# Altium PCB GlassBoard.PcbDoc (part 1 of 2)
Units mil, origin at the board's own origin, x right, y up, seen from the top; angles counter-clockwise.
Board outline 2030 x 2020 mil, 4 copper layers (Top Layer, Plane (GND), Plane (PWR), Bottom Layer), stack 23.756 mil thick; 84 components, 48 nets, 261 pads, 94 vias.
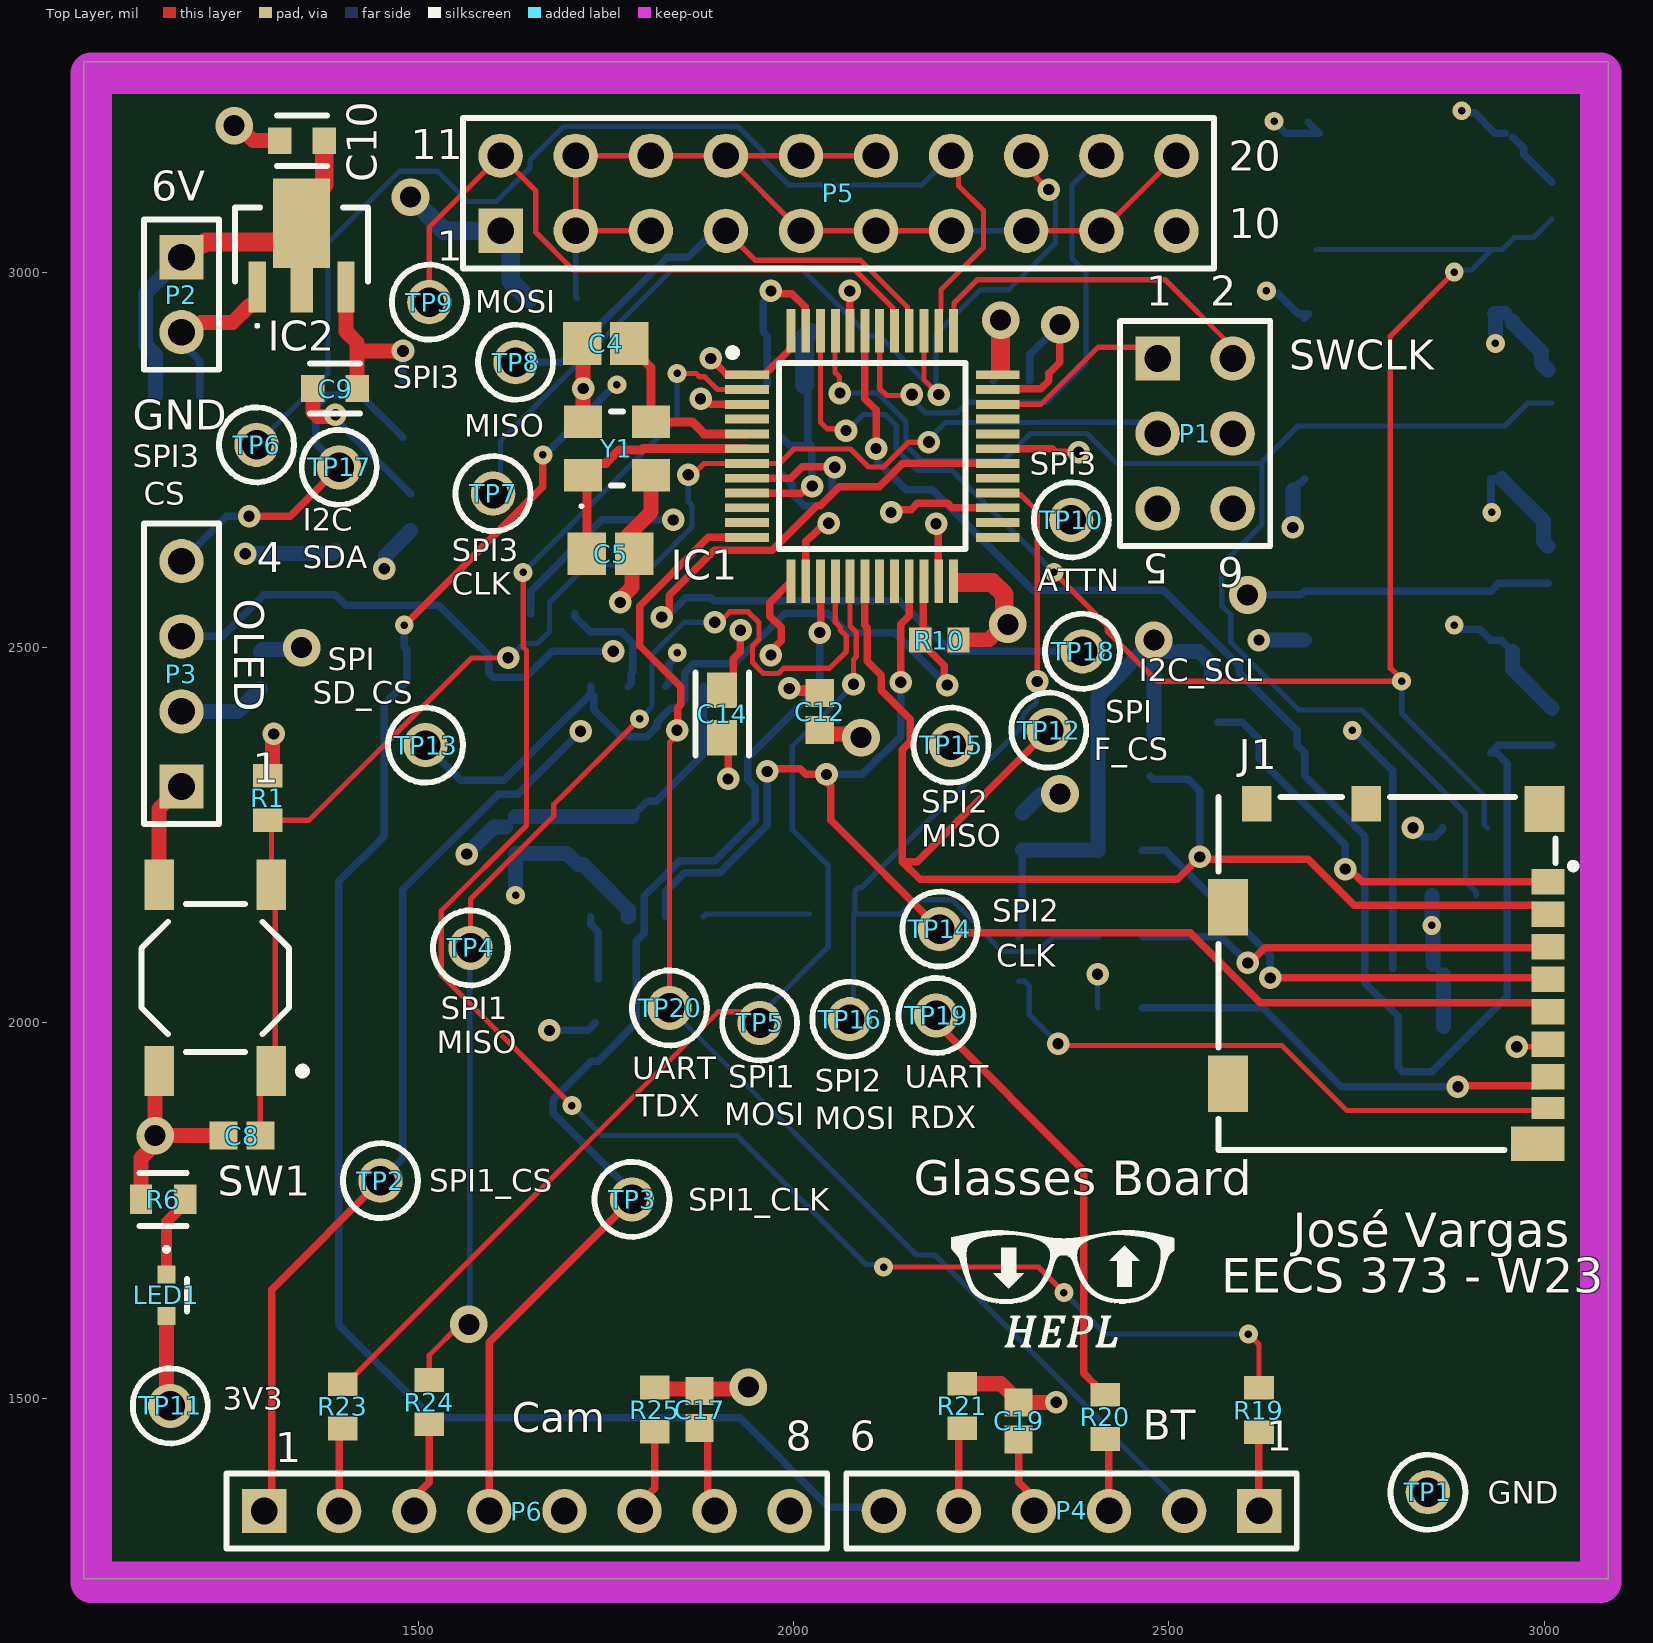
[diagram p0: Top Layer view]
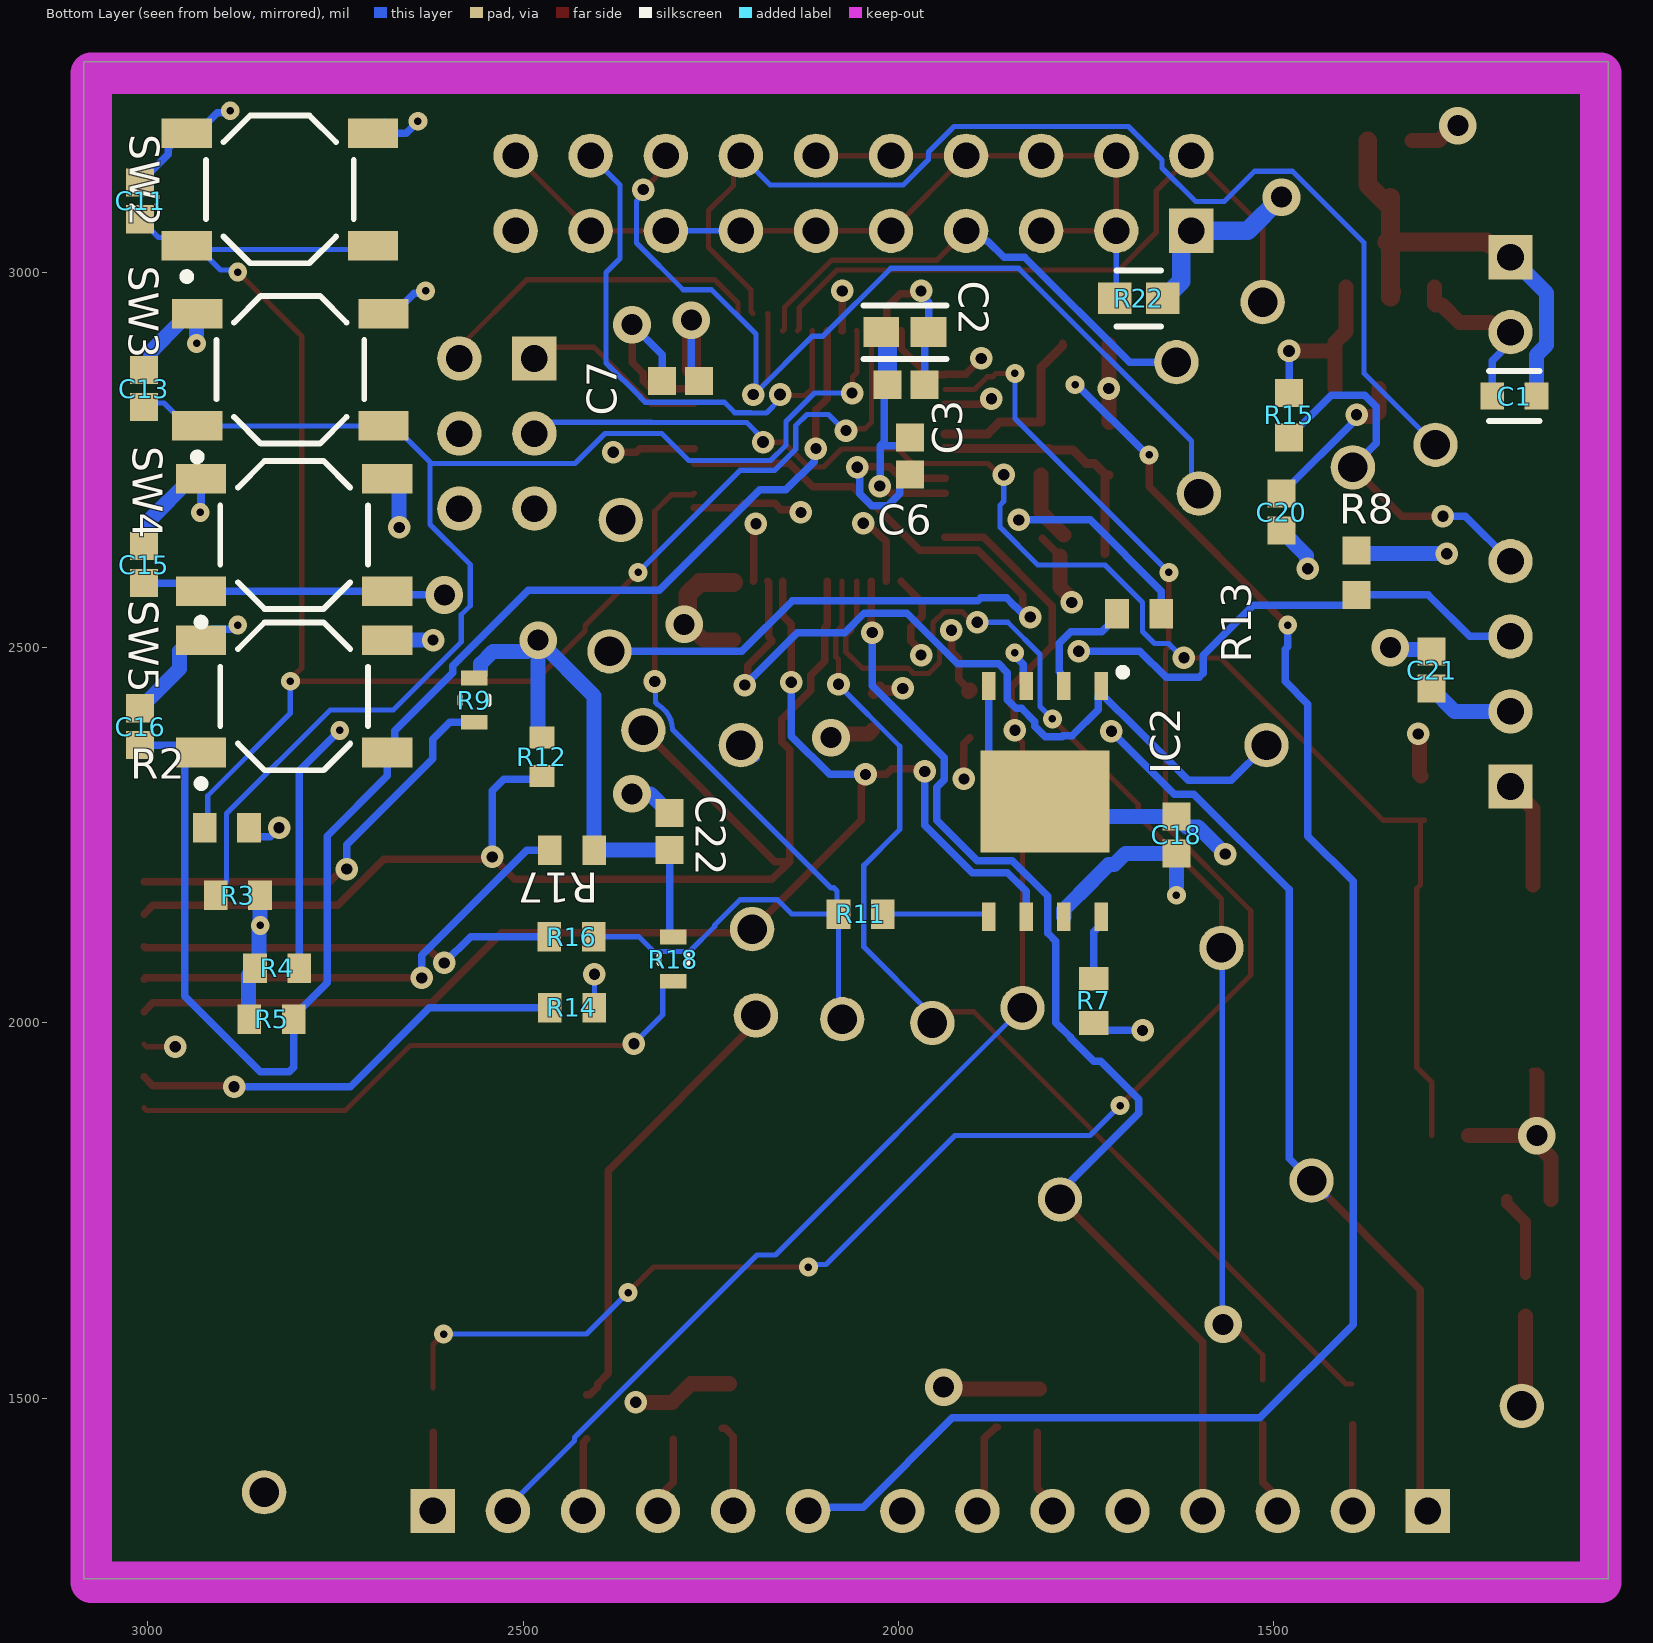
[diagram p1: Bottom Layer view, seen from below]
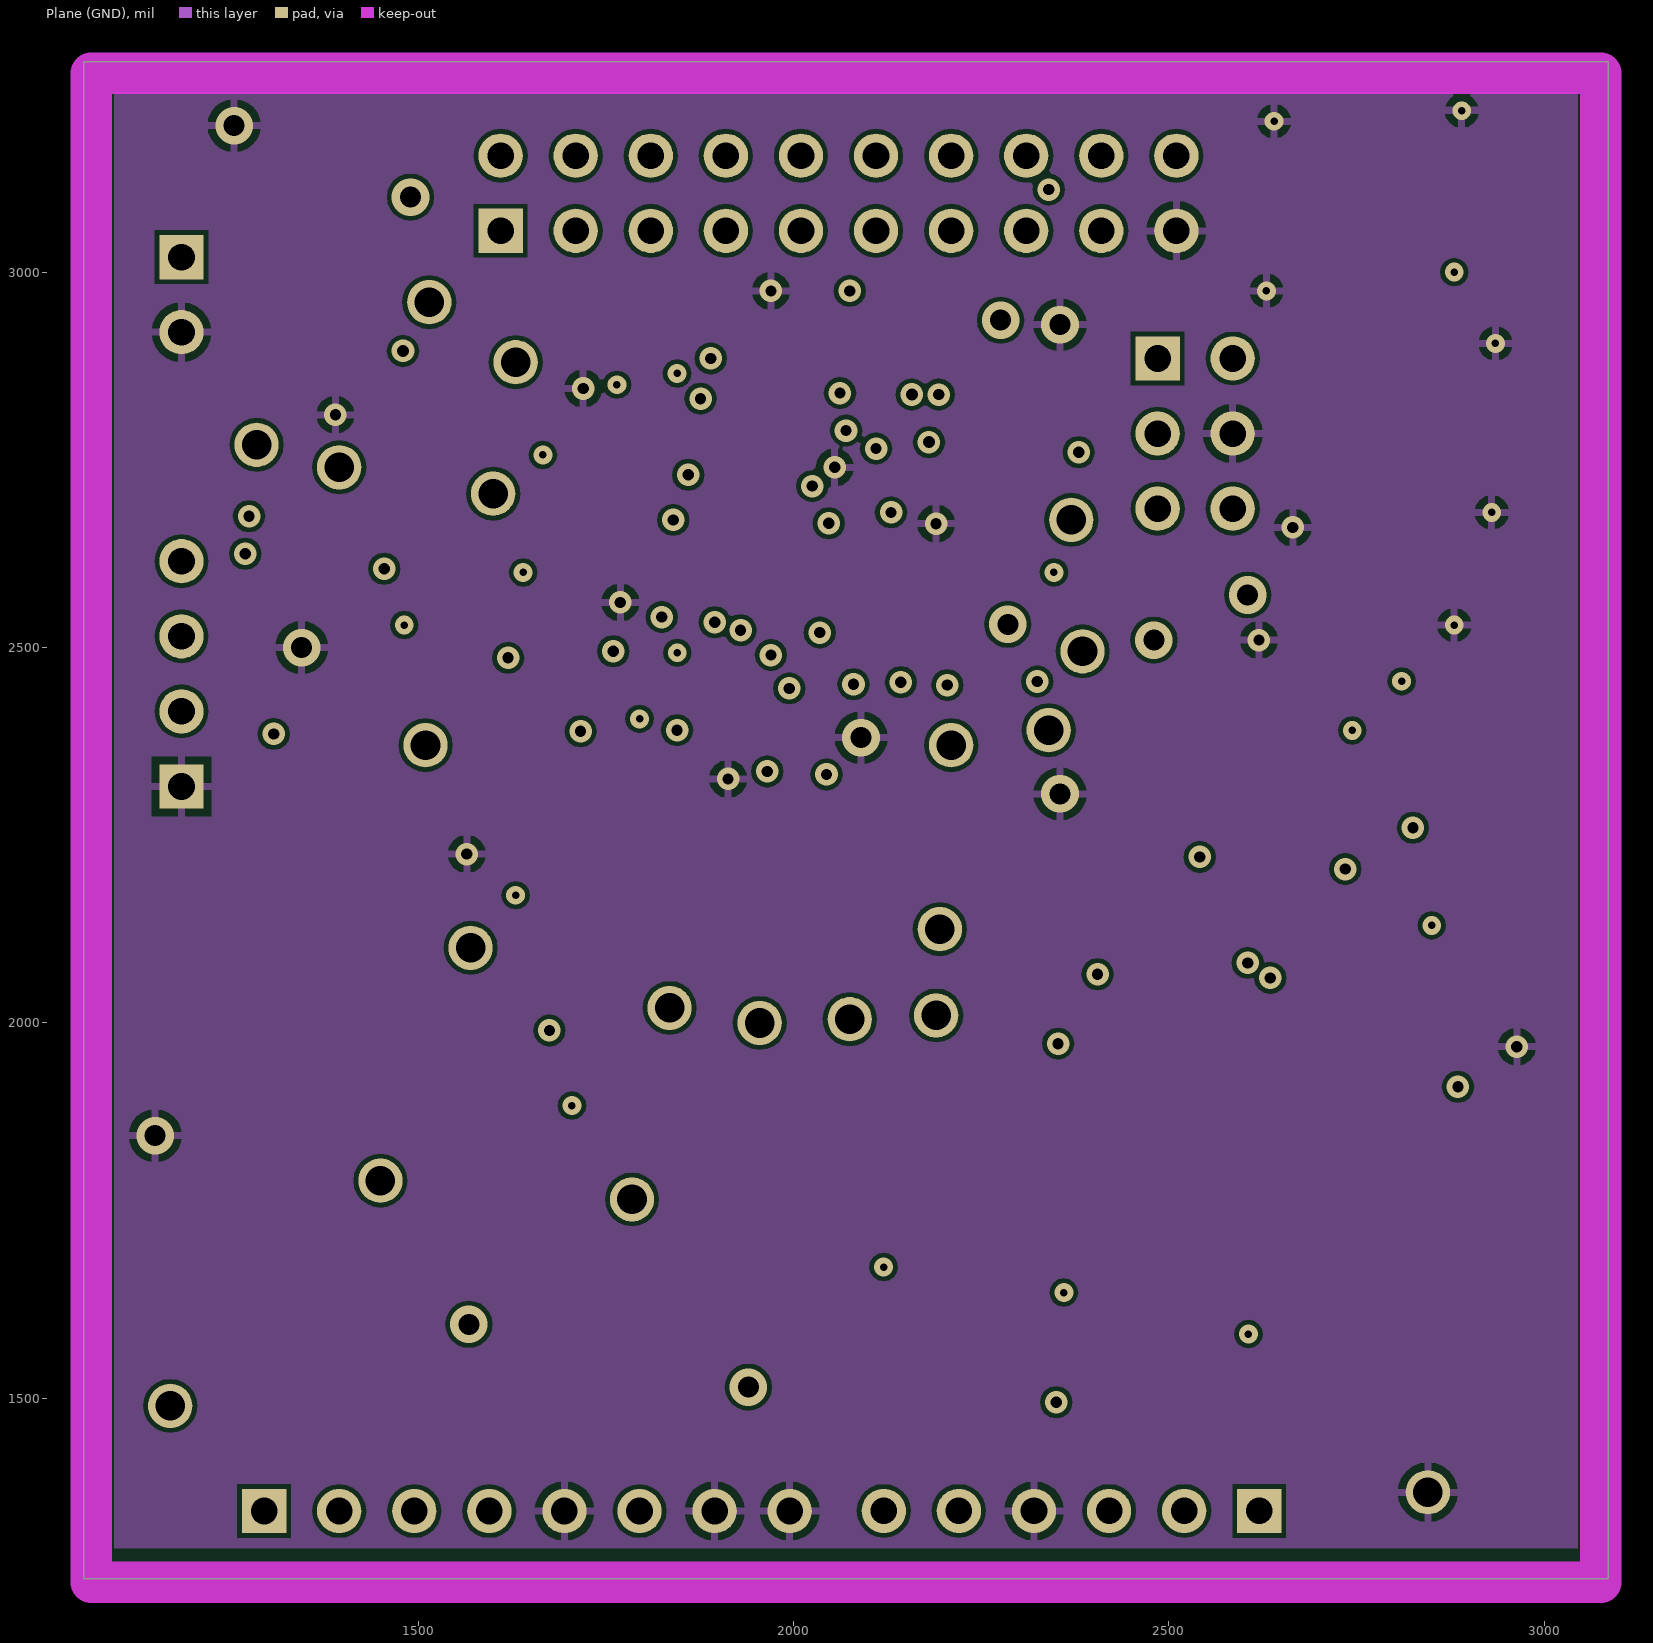
[diagram p2: Plane (GND)]
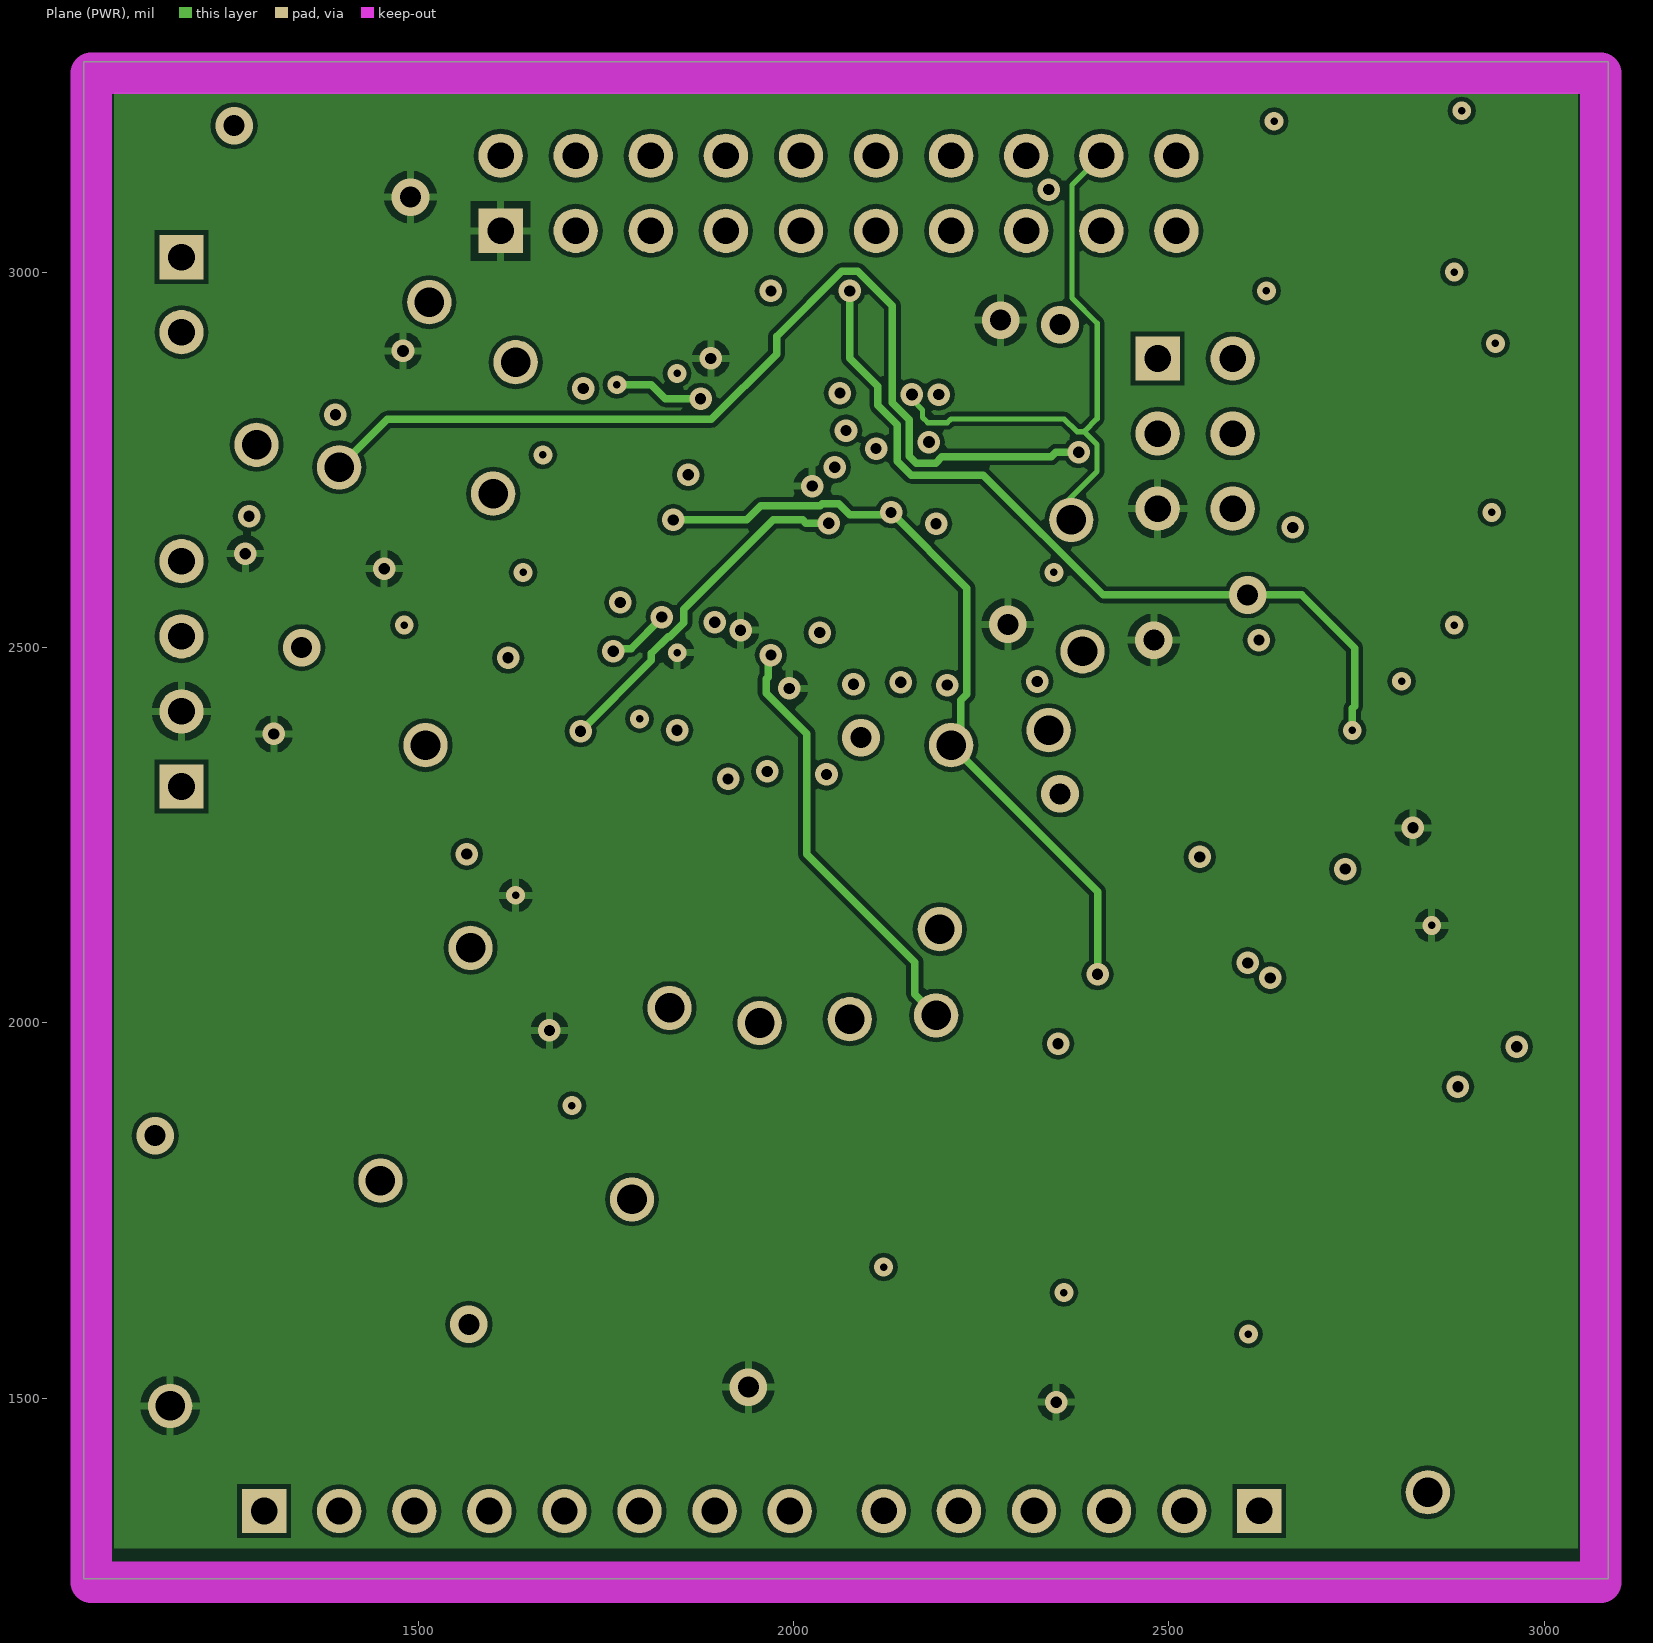
[diagram p3: Plane (PWR)]
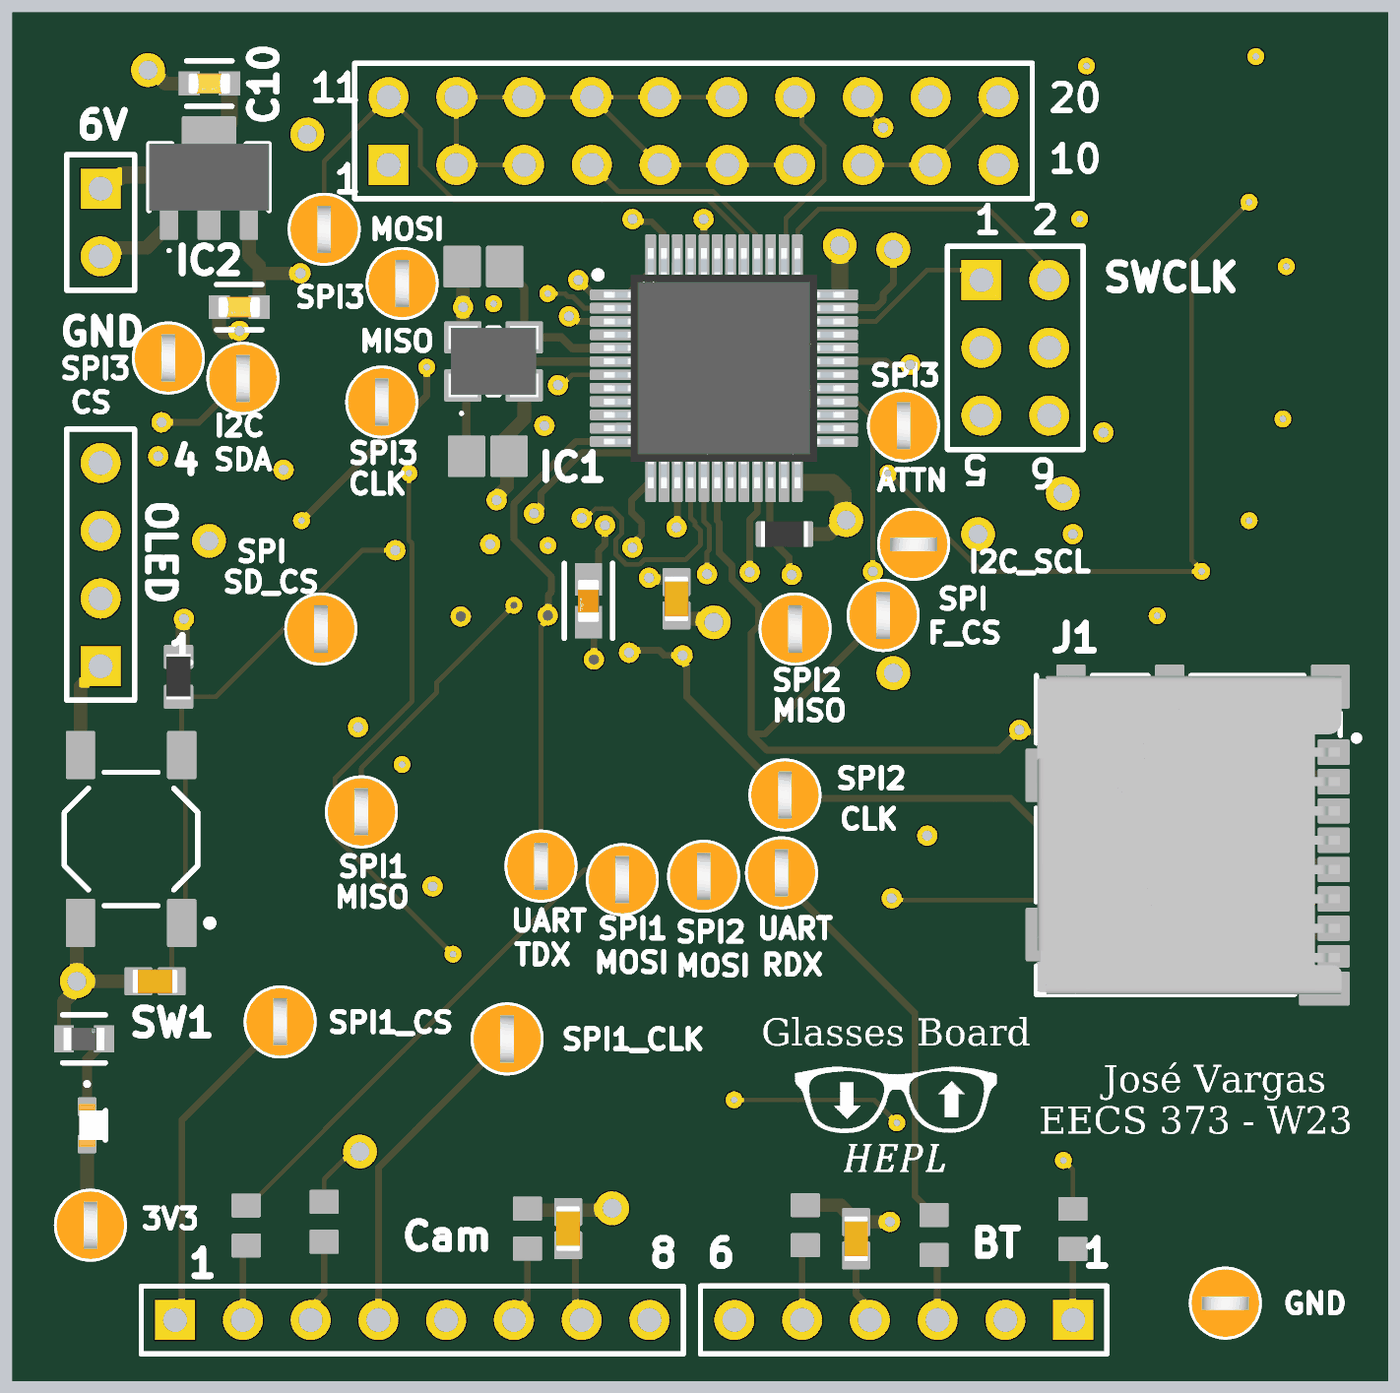
[diagram p4: 3D render of the assembled board from above, using the file's embedded part models]
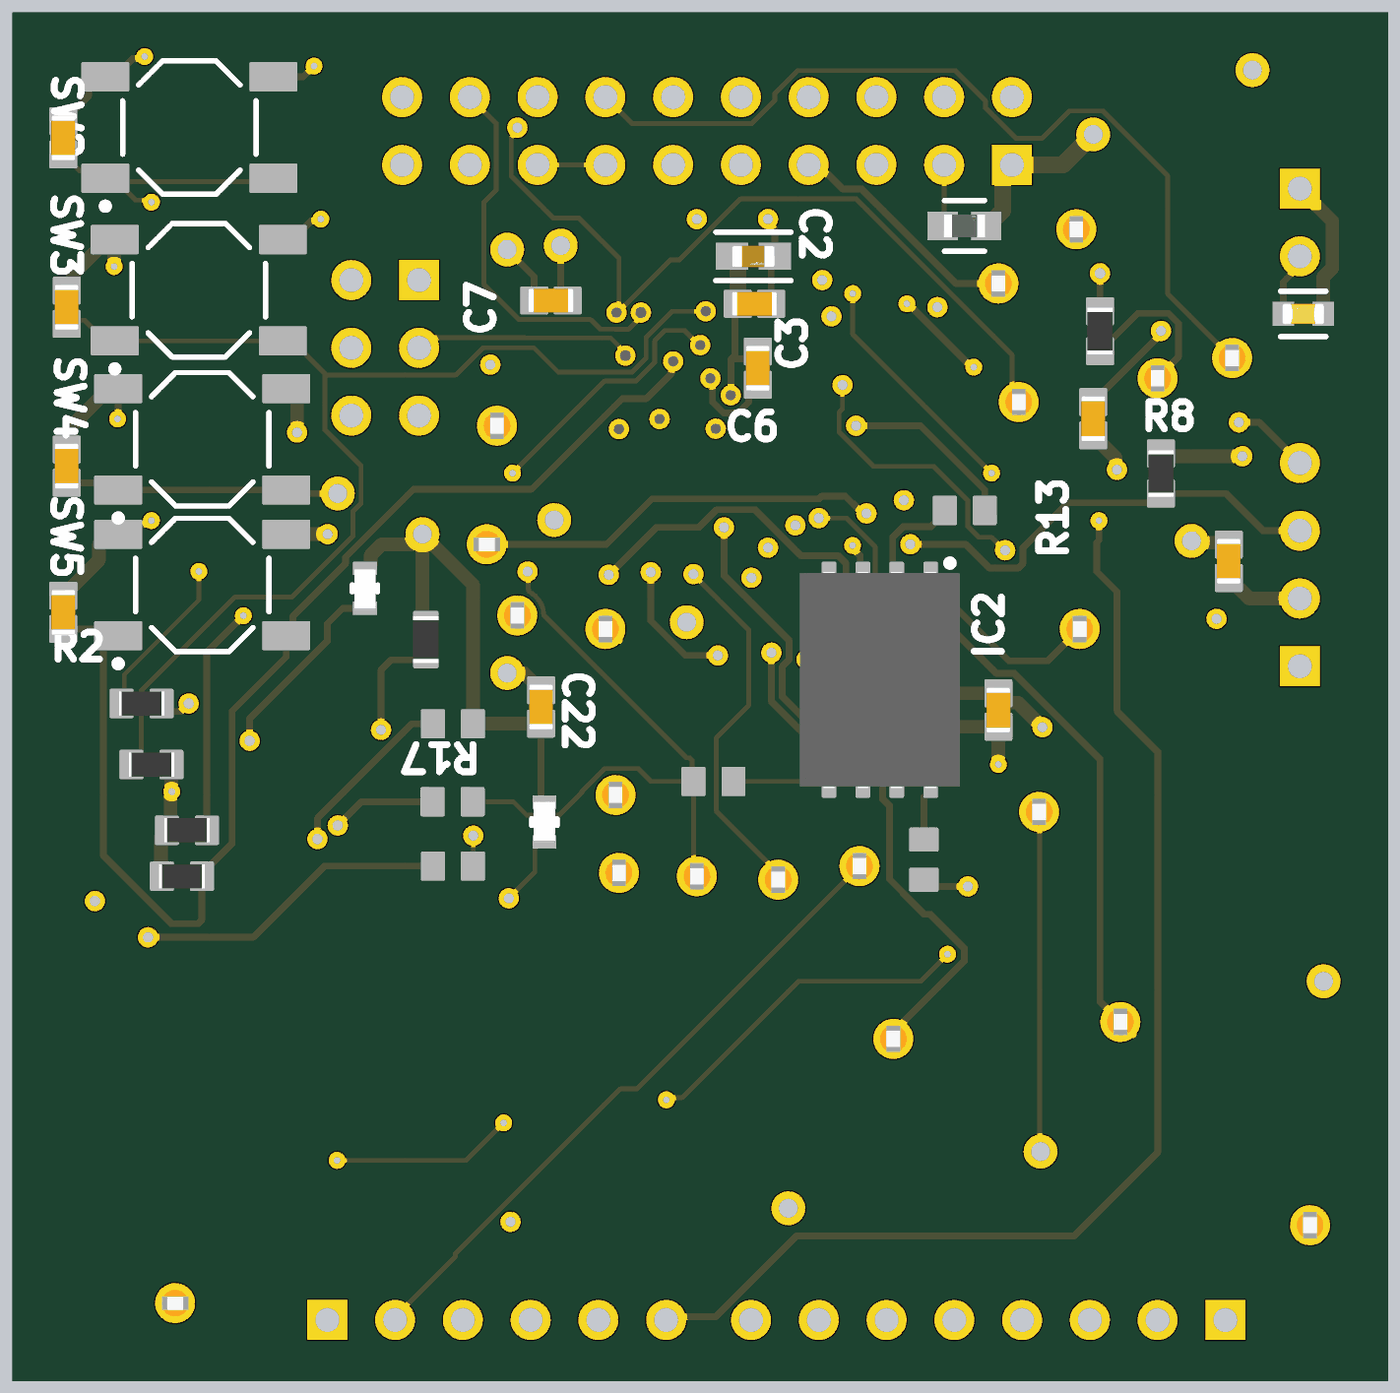
[diagram p5: 3D render of the assembled board from below, using the file's embedded part models]

## Layer stack, top to bottom
Top Solder: solder mask 0.4, Solder Resist, Dk 3.5
Top Layer: signal copper 1.4
Dielectric 2: prepreg 2.8, PP-006, Dk 4.1
Plane (GND): signal copper 1.378
Dielectric 1: dielectric 12.6, FR-4, Dk 4.8
Plane (PWR): signal copper 1.378
Dielectric 3: prepreg 2.8, PP-006, Dk 4.1
Bottom Layer: signal copper 1.4
Bottom Solder: solder mask 0.4, Solder Resist, Dk 3.5

## Board outline
1055,1260 1055,3280 3085,3280 3085,1260

## Design rules (kind name [scope] priority, off if disabled: settings)
BoardOutlineClearance [All] p1: gap=40 ignorepadtopadclearanceinfootprint=FALSE
Clearance [All] p1: gap=6 ignorepadtopadclearanceinfootprint=TRUE
HoleSize [All] p1: absolutevalues=TRUE maxlimit=50 minlimit=3.94 maxpercent=80.000 minpercent=20.000
HoleToHoleClearance [All] p1: gap=19.68 allowstackedmicrovias=TRUE
MinimumAnnularRing [All] p1: minimumring=6
MinimumSolderMaskSliver MinimumSolderMaskSliver_1 [All] p1: minsoldermaskwidth=7.87
PasteMaskExpansion [All] p1: expansion=2
PolygonConnect [All] p1: connectstyle=Relief reliefconductorwidth=10 reliefentries=4 polygonreliefangle="90 Angle" airgapwidth=10
RoutingVias [All] p1: holewidth=10 width=25 viastyle="Through Hole" minholewidth=10 minwidth=25 maxholewidth=10 maxwidth=25
SilkToSilkClearance [All] p1: silktosilkclearance=7.87
SilkToSolderMaskClearance [IsPad] p1: minsilkscreentomaskgap=7.87 clearancetoexposedcopper=TRUE
SolderMaskExpansion [All] p1: expansion=1.97 istentingtop=FALSE
Width [All] p1: maxlimit=30 minlimit=6 preferedwidth=7 minimp=50.000000 maximp=50.000000 favimp=50.000000
24 further rules are at their usual default settings.

## Classes and differential pairs
component class Peripherals: C17 C18 C19 C20 C21 C22 IC2 J1 P3 P4 P5 P6 R7 R8 R9 R10 R11 R12 R13 R14 R15 R16 R17 R18 R19 R20 R21 R22 R23 R24 R25 XBEE
component class GlassBoard: C1 C2 C3 C4 C5 C6 C7 C8 C9 C10 C11 C12 C13 C14 C15 C16 IC1 IC2 LED1 P1 P2 R1 R2 R3 R4 R5 R6 "r     r" SW1 SW2 SW3 SW4 SW5 TP1 TP2 TP3 TP4 TP5 TP6 TP7 TP8 TP9 TP10 TP11 TP12 TP13 TP14 TP15 TP16 TP17 TP18 TP19 TP20 Y1

## Components (designator, comment, footprint, x,y, rotation, side; value= is the part's Value field where it differs from the comment)
C1 "1uF" FP-CC0603-DA-MFG 1180,2835 r0 bottom value="1 uF"
C2 "10uF" FP-GRM188-0_1-e0_2_0_55-IPC_A 1991.57,2920 r180 bottom
C3 "Capacitor 100 nF +/-10% 50 V 0603" CAPC1608X90X40NL10T20 1990,2850 r0 bottom value=100nF
C4 "20pF" CAPC2013X140X50NL20T25 1750,2905 r180 top
C5 "20pF" CAPC2013X140X50NL20T25 1756.5,2625 r180 top
C6 "Capacitor 100 nF +/-10% 50 V 0603" CAPC1608X90X40NL10T20 1985,2755 r90 bottom value=100nF
C7 "Capacitor 100 nF +/-10% 50 V 0603" CAPC1608X90X40NL10T20 2290.39,2855 r180 bottom value=100nF
C8 "Capacitor 100 nF +/-10% 50 V 0603" CAPC1608X90X40NL10T20 1265.39,1850 r0 top value=100nF
C9 "1uF" FP-CC0603-DA-MFG 1389.53,2845 r0 top value="1 uF"
C10 "1uF" FP-CC0603-DA-MFG 1345.47,3175 r0 top value="1 uF"
C11 "Capacitor 100 nF +/-10% 50 V 0603" CAPC1608X90X40NL10T20 3010,3095 r90 bottom value=100nF
C12 "Capacitor 100 nF +/-10% 50 V 0603" CAPC1608X90X40NL10T20 2035,2414.61 r90 top value=100nF
C13 "Capacitor 100 nF +/-10% 50 V 0603" CAPC1608X90X40NL10T20 3005,2845 r90 bottom value=100nF
C14 "10uF" FP-GRM188-0_1-e0_2_0_55-IPC_A 1905,2411.57 r270 top
C15 "Capacitor 100 nF +/-10% 50 V 0603" CAPC1608X90X40NL10T20 3005,2610.39 r90 bottom value=100nF
C16 "Capacitor 100 nF +/-10% 50 V 0603" CAPC1608X90X40NL10T20 3010,2394.61 r90 bottom value=100nF
C17 "Capacitor 100 nF +/-10% 50 V 0603" CAPC1608X90X40NL10T20 1875,1485 r90 top value=100nF
C18 "Capacitor 100 nF +/-10% 50 V 0603" CAPC1608X90X40NL10T20 1630,2250.39 r270 bottom value=100nF
C19 "Capacitor 100 nF +/-10% 50 V 0603" CAPC1608X90X40NL10T20 2300,1470 r90 top value=100nF
C20 "Capacitor 100 nF +/-10% 50 V 0603" CAPC1608X90X40NL10T20 1490,2680.39 r270 bottom value=100nF
C21 "Capacitor 100 nF +/-10% 50 V 0603" CAPC1608X90X40NL10T20 1290,2470 r270 bottom value=100nF
C22 "Capacitor 100 nF +/-10% 50 V 0603" CAPC1608X90X40NL10T20 2305,2255 r270 bottom value=100nF
IC1 "STM32L443CCT6" QFP50P900X900X160-48N 2105,2755 r0 top
IC2 "AP7365-33YRG-13" AP736533YRG13 1345,3036.85 r0 top
IC2 "W25N01GVZEIG_TR" SON127P800X600X80-9N-D 1805,2295 r270 bottom
J1 "104031-0811" 1040310811 3014.76,2065.91 r90 top
LED1 "Blue - 0603" 155060BS75300 1165,1637.44 r270 top
P1 "Debug Header" HDR2X3 2485,2885 r270 top
P2 "6V Battery" HDR1X2 1185,3020 r270 top
P3 "OLED Display" HDR1X4 1185,2315 r90 top
P4 "Bluetooth Chip" HDR1X6 2620.36,1350.12 r180 top
P5 "XBEE" HDR2X10_CEN 1610,3055 r0 top
P6 "Arducam" HDR1X8 1295,1350 r0 top
R1 "Resistor 10k +/-1% 0603 100 mW" RESC1608X55X25ML10T15 1300,2299.53 r90 top value="10k - 0603"
R2 "Resistor 10k +/-1% 0603 100 mW" RESC1608X55X25ML10T15 2894.53,2260 r180 bottom value=10k
R3 "Resistor 10k +/-1% 0603 100 mW" RESC1608X55X25ML10T15 2880,2170 r180 bottom value=10k
R4 "Resistor 10k +/-1% 0603 100 mW" RESC1608X55X25ML10T15 2827.6,2072.87 r0 bottom value=10k
R5 "Resistor 10k +/-1% 0603 100 mW" RESC1608X55X25ML10T15 2835,2005 r0 bottom value=10k
R6 "220 - 0603" FP-CRCW0603-e3-MFG 1160.47,1765 r0 top
R7 "0 - 0603" RESC1608X55X25ML10T15 1740,2029.53 r90 bottom
R8 "4.7k - 0603" RESC1608X55X30NL15T15 1390,2599.53 r90 bottom
R9 "50k - 0603" FP-TNPU0603-e3-MFG 2565,2430 r90 bottom
R10 "10k - 0603" RESC1609X55X30LL15T15 2194.41,2510 r0 top
R11 "0 - 0603" RESC1608X55X25ML10T15 2050.47,2145 r180 bottom
R12 "10k - 0603" RESC1609X55X30LL15T15 2475,2354.41 r90 bottom
R13 "0 - 0603" RESC1608X55X25ML10T15 1679.53,2545 r180 bottom
R14 "0 - 0603" RESC1608X55X25ML10T15 2435,2020 r180 bottom
R15 "4.7k - 0603" RESC1608X55X30NL15T15 1480,2809.53 r270 bottom
R16 "0 - 0603" RESC1608X55X25ML10T15 2435.47,2115 r180 bottom
R17 "0 - 0603" RESC1608X55X25ML10T15 2435,2230 r180 bottom
R18 "50k - 0603" FP-TNPU0603-e3-MFG 2300,2085 r270 bottom
R19 "0 - 0603" RESC1608X55X25ML10T15 2620,1484.53 r270 top
R20 "0 - 0603" RESC1608X55X25ML10T15 2415,1475.47 r270 top
R21 "0 - 0603" RESC1608X55X25ML10T15 2225,1490 r270 top
R22 "27k - 0603" FP-CRCW0603-e3-IPC_A 1680,2965 r180 bottom
R23 "0 - 0603" RESC1608X55X25ML10T15 1400,1489.53 r270 top
R24 "0 - 0603" RESC1608X55X25ML10T15 1515,1495 r90 top
R25 "0 - 0603" RESC1608X55X25ML10T15 1815,1485 r270 top
SW1 "TL3342F160QG" ESWI-TL3342F160QG_V 1230,2060 r180 top
SW2 "TL3342F160QG" ESWI-TL3342F160QG_V 2824.02,3110.2 r90 bottom
SW3 "TL3342F160QG" ESWI-TL3342F160QG_V 2810,2870 r90 bottom
SW4 "TL3342F160QG" ESWI-TL3342F160QG_V 2805,2650 r90 bottom
SW5 "TL3342F160QG" ESWI-TL3342F160QG_V 2805,2435 r90 bottom
TP1 "5003" KSTN-5003 2845,1375 r0 top
TP2 "5003" KSTN-5003 1450,1790 r90 top
TP3 "5003" KSTN-5003 1785,1765 r90 top
TP4 "5003" KSTN-5003 1569.96,2100.04 r90 top
TP5 "5003" KSTN-5003 1955,2000 r90 top
TP6 "5003" KSTN-5003 1285,2770 r270 top
TP7 "5003" KSTN-5003 1600,2705 r270 top
TP8 "5003" KSTN-5003 1630,2880 r270 top
TP9 "5003" KSTN-5003 1515,2960 r270 top
TP10 "5003" KSTN-5003 2370,2670 r270 top
TP11 "5003" KSTN-5003 1170,1490 r90 top
TP12 "5003" KSTN-5003 2340,2390 r90 top
TP13 "5003" KSTN-5003 1510,2370 r90 top
TP14 "5003" KSTN-5003 2195,2125 r90 top
TP15 "5003" KSTN-5003 2210,2370 r90 top
TP16 "5003" KSTN-5003 2075,2005 r90 top
TP17 "5003" KSTN-5003 1395,2740 r90 top
TP18 "5003" KSTN-5003 2385,2495 r180 top
TP19 "5003" KSTN-5003 2190,2010 r90 top
TP20 "5003" KSTN-5003 1835,2020 r90 top
Y1 "ECS-160-12-33-AGN-TR3" ECS1601233AGNTR3 1765,2765 r0 top

## Footprints (in the part's own frame and the unit in brackets; to place one, negate y for a bottom-side part, rotate by r counter-clockwise, add the part's x,y. Pads: shape width x height; smd on the part's side, far side on the other; paste and mask are expansions set on the pad)
155060BS75300 [mm]
  rect 0.6x0.6 smd: 1(-0.7,0) 2(0.7,0)
  silkscreen extent -1.6,-0.05 0.55,0.69, body extent -0.8,-0.31 0.8,0.69, height 1
1040310811 [mm]
  rect 0.85x1.1 smd: 1(3.105,0.25) 2(2.005,0.25) 3(0.905,0.25) 4(-0.195,0.25) 5(-1.295,0.25) 6(-2.395,0.25) 7(-3.495,0.25)
  rect 0.75x1.1 smd: 8(-4.545,0.25)
  rect 1.17x1.8 smd: 9(-5.755,0.6)
  rect 1.9x1.35 smd: 10(-3.73,11.075) 11(2.24,11.075)
  rect 1.2x1 smd: 12(5.74,10.1) 13(5.74,6.4)
  rect 1.55x1.35 smd: 14(5.565,0.375)
  silkscreen extent -5.98,-0.72 5.97,11.4, body extent -5.97,-0.04 5.98,11.36, height 1.45
AP736533YRG13 [mm]
  rect 0.58x1.73 smd: 1(-1.5,-1.435) 3(1.5,-1.435)
  rect 0.76x1.5 smd: 2(0,-1.55)
  rect 1.933x3.03 smd: 4(0,0.715)
  silkscreen extent -2.25,-2.8 2.25,1.25, body extent -2.25,-1.25 2.25,1.25, height 1.7
CAPC1608X90X40NL10T20 [mm] "Chip Capacitor, 2-Leads, Body 1.70x0.90mm, IPC Medium Density"
  rect 0.95x0.95 smd: 1(-0.625,0) 2(0.625,0)
  body extent -0.85,-0.45 0.85,0.45, height 0.9
CAPC2013X140X50NL20T25 [mm] "Chip Capacitor, 2-Leads, Body 2.00x1.25mm, IPC Medium Density"
  rect 1.3x1.45 smd: 1(-0.8,0) 2(0.8,0)
  body extent -1.1,-0.72 1.1,0.72, height 1.4
ECS1601233AGNTR3 [mm]
  rect 1.3x1.1 smd: 1(-1.15,-0.9) 2(1.15,-0.9) 3(1.15,0.9) 4(-1.15,0.9)
  silkscreen extent -1.25,-2 0.2,1.25, body extent -1.69,-1.34 1.69,1.34, height 0.9
ESWI-TL3342F160QG_V [mm] "SMD, 4-Leads, Body 5x5mm, Pitch 6.3mm"
  rect 1x1.7 smd: 1(-1.9,3.15) 2(-1.9,-3.15) 3(1.9,3.15) 4(1.9,-3.15)
  silkscreen extent -3.07,-2.5 2.5,3.27, body extent -2.5,-2.5 2.5,2.5, height 1.5
FP-CC0603-DA-MFG [mm]
  rect 0.8x0.9 smd paste+0 mask+0: 1(-0.75,0) 2(0.75,0)
  silkscreen extent -0.85,-0.85 0.85,0.85, body extent -0.8,-0.4 0.8,0.4, height 0.9
FP-CRCW0603-e3-IPC_A [mil]
  rect 44.69x41.82 smd paste+0 mask+0: 1(-32.1,0) 2(32.1,0)
  silkscreen extent -30,-37 30,37, body extent -31,-17 31,17, height 20
FP-CRCW0603-e3-MFG [mm]
  rect 0.75x1 smd paste+0 mask+0: 1(-0.75,0) 2(0.75,0)
  silkscreen extent -0.8,-0.9 0.8,0.9, body extent -1.22,-0.6 1.22,0.6, height 0.25
FP-GRM188-0_1-e0_2_0_55-IPC_A [mil]
  rect 47.57x39.85 smd paste+0 mask+0: 1(-31.57,0) 2(31.57,0)
  silkscreen extent -55,-36 55,36, body extent -31,-16 31,16, height 36
FP-TNPU0603-e3-MFG [mm]
  rect 0.5x0.9 smd paste+0 mask+0: 1(-0.75,0) 2(0.75,0)
  silkscreen extent -0.13,-0.47 0.13,0.47, body extent -0.8,-0.4 0.75,0.4, height 0.55
HDR1X2 [mm] "Connector; Header; 2 Position"
  rect 1.5x1.5 hole 0.9: 1(0,0)
  round 1.5 hole 0.9: 2(2.54,0)
  silkscreen extent -1.27,-1.27 3.81,1.27
HDR1X4 [mm] "Connector; Header; 4 Position"
  rect 1.5x1.5 hole 0.9: 1(0,0)
  round 1.5 hole 0.9: 2(2.54,0) 3(5.08,0) 4(7.62,0)
  silkscreen extent -1.27,-1.27 8.89,1.27
HDR1X6 [mm] "Connector; Header; 6 Position"
  rect 1.5x1.5 hole 0.9: 1(0,0)
  round 1.5 hole 0.9: 2(2.54,0) 3(5.08,0) 4(7.62,0) 5(10.16,0) 6(12.7,0)
  silkscreen extent -1.27,-1.27 13.97,1.27
HDR1X8 [mm] "Connector; Header; 8 Position"
  rect 1.5x1.5 hole 0.9: 1(0,0)
  round 1.5 hole 0.9: 2(2.54,0) 3(5.08,0) 4(7.62,0) 5(10.16,0) 6(12.7,0) 7(15.24,0) 8(17.78,0)
  silkscreen extent -1.27,-1.27 19.05,1.27
HDR2X3 [mm] "Connector; Header; 3x2 Position"
  rect 1.5x1.5 hole 0.9: 1(0,0)
  round 1.5 hole 0.9: 2(0,2.54) 3(2.54,0) 4(2.54,2.54) 5(5.08,0) 6(5.08,2.54)
  silkscreen extent -1.27,-1.27 6.35,3.81
HDR2X10_CEN [mm] "Connector; Header; 10x2 Position"
  rect 1.5x1.5 hole 0.9: 1(0,0)
  round 1.5 hole 0.9: 2(2.54,0) 3(5.08,0) 4(7.62,0) 5(10.16,0) 6(12.7,0) 7(15.24,0) 8(17.78,0) 9(20.32,0) 10(22.86,0) 11(0,2.54) 12(2.54,2.54) 13(5.08,2.54) 14(7.62,2.54) 15(10.16,2.54) 16(12.7,2.54) 17(15.24,2.54) 18(17.78,2.54) 19(20.32,2.54) 20(22.86,2.54)
  silkscreen extent -1.27,-1.27 24.13,3.81
KSTN-5003 [mm] "Test Point, Through Hole, Dia 2.54mm"
  round 1.5 hole 1: 1(0,0)
  silkscreen extent -1.27,-1.27 1.27,1.27, body extent -1.27,-1.27 1.27,1.27, height 4.57
QFP50P900X900X160-48N [mm]
  rect 1.475x0.3 smd: 1(-4.238,2.75) 2(-4.238,2.25) 3(-4.238,1.75) 4(-4.238,1.25) 5(-4.238,0.75) 6(-4.238,0.25) 7(-4.238,-0.25) 8(-4.238,-0.75) 9(-4.238,-1.25) 10(-4.238,-1.75) 11(-4.238,-2.25) 12(-4.238,-2.75) 25(4.238,-2.75) 26(4.238,-2.25) 27(4.238,-1.75) 28(4.238,-1.25) 29(4.238,-0.75) 30(4.238,-0.25) 31(4.238,0.25) 32(4.238,0.75) 33(4.238,1.25) 34(4.238,1.75) 35(4.238,2.25) 36(4.238,2.75)
  rect 0.3x1.475 smd: 13(-2.75,-4.238) 14(-2.25,-4.238) 15(-1.75,-4.238) 16(-1.25,-4.238) 17(-0.75,-4.238) 18(-0.25,-4.238) 19(0.25,-4.238) 20(0.75,-4.238) 21(1.25,-4.238) 22(1.75,-4.238) 23(2.25,-4.238) 24(2.75,-4.238) 37(2.75,4.238) 38(2.25,4.238) 39(1.75,4.238) 40(1.25,4.238) 41(0.75,4.238) 42(0.25,4.238) 43(-0.25,4.238) 44(-0.75,4.238) 45(-1.25,4.238) 46(-1.75,4.238) 47(-2.25,4.238) 48(-2.75,4.238)
  silkscreen extent -4.85,-3.15 3.15,3.62, body extent -4.5,-4.5 4.5,4.5, height 1.6
RESC1608X55X25ML10T15 [mm] "Chip Resistor, 2-Leads, Body 1.70x0.90mm, IPC Low Density"
  rect 0.8x1 smd: 1(-0.75,0) 2(0.75,0)
  body extent -0.85,-0.45 0.85,0.45, height 0.55
RESC1608X55X30NL15T15 [mm] "Chip Resistor, 2-Leads, Body 1.75x0.95mm, IPC Medium Density"
  rect 0.95x0.95 smd: 1(-0.75,0) 2(0.75,0)
  body extent -0.87,-0.48 0.87,0.48, height 0.55
RESC1609X55X30LL15T15 [mm] "Chip Resistor, 2-Leads, Body 1.75x0.95mm, IPC High Density"
  rect 0.75x0.85 smd: 1(-0.65,0) 2(0.65,0)
  body extent -0.87,-0.48 0.87,0.48, height 0.55
SON127P800X600X80-9N-D [mm]
  rect 0.95x0.45 smd: 1(-3.9,1.905) 2(-3.9,0.635) 3(-3.9,-0.635) 4(-3.9,-1.905) 5(3.9,-1.905) 6(3.9,-0.635) 7(3.9,0.635) 8(3.9,1.905)
  rect 3.45x4.35 smd: 9(0,0)
  silkscreen extent -4.5,2.5 -4.25,2.75, body extent -4.05,-3 4.05,3, height 0.8

## Part data
C1 C9 C10: library part CMP-03422-000924-1, "CAP CER 1UF 16V X7R 0603", Capacitance="1 uF", Manufacturer=YAGEO, Manufacturer Part Number=CC0603KRX7R7BB105, Package=CC0603-DA, Temperature="-55°C to +125°C", Temperature Characteristic=X7R, Temperature Coefficient=15%, Temperature Range High=+125°C, Temperature Range Low=-55°C, Tolerance=0.1, Voltage="16 V", Automotive=No, Category=Cap, ComponentLink2Description=Datasheet, ComponentLink2URL=http://www.yageo.com/documents/recent/UPY-GPHC_X7R_6.3V-to-50V_18.pdf, Device Class L1="Passive Components", Device Class L2=Capacitors, Device Class L3="Ceramic Capacitors", Digikey Description="CAP CER 1UF 16V X7R 0603", Footprint Url=http://www.yageo.com/exep/pages/download/literatures/UPY-C_GEN_24.pdf, Height=0.9mm, Lead Free=Yes, Material=Ceramic, Mouser Description="Multilayer Ceramic Capacitor, CC Series, 1 - F, - 10%, X7R, 16 V, 0603 [1608 Metric]", Octopart=https://octopart.com/cc0603krx7r7bb105-yageo-42271928, RoHS=TRUE, Voltage Rating="16 V"
C2 C14: library part CMP-2006-02792-2, "Chip Multilayer Ceramic Capacitors for General Purpose, 0603, 10uF, X5R, 15%, 20%, 6.3V", Case Code (Imperial)=0603, Case Code (Metric)=1608, Dielectric=X5R, Max Operating Temperature=85°C, Min Operating Temperature=-55°C, Package Quantity=4000, Tolerance=20%, Voltage=6.3V, Capacitance=10uF, Case/Package=0603, Depth=0.8mm, Height=0.8mm, Lead Free="Lead Free", Length=1.6mm, Material=Ceramic, Mount="Surface Mount", Packaging="Tape and Reel", Radiation Hardening=No, REACH SVHC="No SVHC", Termination=SMD/SMT, Thickness=0.035inch, Voltage Rating=6.3V, Voltage Rating (DC)=6.3V, Width=0.031inch
C3 C6 C7 C8 C11 C12 C13 C15 C16 C17 C18 C19 C20 C21 C22: library part CMP-001-00017-6, "Chip Capacitor, 100 nF, +/- 10%, 50 V, 0603 (1608 Metric)", Capacitor Type=Ceramic, Case/Package=0603, Max Operating Temperature=125°C, Min Operating Temperature=-55°C, Tolerance=10%, Voltage Rating=50V, Mounting Technology=SM, Pins=2, RoHS Compliant=True
C4 C5: library part CMP-2007-04537-1, Manufacturer="AVX Interconnect / Elco", Part Number=08051A200JAT2A
IC1: "Integrated Circuit", Manufacturer_Name=STMicroelectronics, Mouser Part Number=511-STM32L443CCT6, Arrow Part Number=STM32L443CCT6, Arrow Price/Stock=https://www.arrow.com/en/products/stm32l443cct6/stmicroelectronics?region=nac, Datasheet Link=https://componentsearchengine.com/Datasheets/2/STM32L443CCT6.pdf, Height=1.6mm, Manufacturer_Part_Number=STM32L443CCT6, Mouser Price/Stock=https://www.mouser.co.uk/ProductDetail/STMicroelectronics/STM32L443CCT6?qs=dTJS0cRn7ohLPtZ3IeJ%2Fbg%3D%3D
IC2: "Integrated Circuit", Manufacturer_Name="Diodes Inc.", Mouser Part Number=621-AP7365-33YRG-13, Datasheet Link=https://componentsearchengine.com//AP7365-33YRG-13.pdf, Height=1.6mm, Manufacturer_Part_Number=AP7365-33YRG-13, Mouser Price/Stock=https://www.mouser.co.uk/ProductDetail/Diodes-Incorporated/AP7365-33YRG-13?qs=abZ1nkZpTuM6iU77d8ddPA%3D%3D
IC2: "Integrated Circuit", Arrow Part Number="W25N01GVZEIG TR", Manufacturer_Name=Winbond, Mouser Part Number=454-W25N01GVZEIGTR, Arrow Price/Stock=https://www.arrow.com/en/products/w25n01gvzeigtr/winbond-electronics?region=nac, Datasheet Link="https://www.winbond.com/resource-files/w25n01gv revg 032116.pdf", Height=0.8mm, Manufacturer_Part_Number="W25N01GVZEIG TR", Mouser Price/Stock=https://www.mouser.co.uk/ProductDetail/Winbond/W25N01GVZEIG-TR?qs=qSfuJ%252Bfl%2Fd6niBi0Qz1MPg%3D%3D
J1: "Connector", Manufacturer_Name=Molex, Mouser Part Number=538-104031-0811, Datasheet Link=http://www.molex.com/webdocs/datasheets/pdf/en-us/1040310811_MEMORY_CARD_SOCKET.pdf, Manufacturer_Part_Number=104031-0811, Mouser Price/Stock=https://www.mouser.co.uk/ProductDetail/Molex/104031-0811?qs=udsGRKD4nA3Tvy7wqky%252BuA%3D%3D
LED1: library part 155060BS75300, "LED", Manufacturer_Name="Wurth Elektronik", Mouser Part Number=710-155060BS75300, Datasheet Link=https://www.mouser.fr/datasheet/2/445/155060BS75300-1838907.pdf, Height=1mm, Manufacturer_Part_Number=155060BS75300, Mouser Price/Stock=https://www.mouser.co.uk/ProductDetail/Wurth-Elektronik/155060BS75300?qs=GedFDFLaBXFE8klTFAyuFA%3D%3D
P1: library part "Header 3X2", "Header, 3-Pin, Dual row", LatestRevisionDate=17-Jul-2002, LatestRevisionNote="Re-released for DXP Platform.", Publisher="Altium Limited"
P2: library part "Header 2", "Header, 2-Pin", LatestRevisionDate=17-Jul-2002, LatestRevisionNote="Re-released for DXP Platform.", Publisher="Altium Limited"
P3: library part "Header 4", "Header, 4-Pin", LatestRevisionDate=17-Jul-2002, LatestRevisionNote="Re-released for DXP Platform.", Publisher="Altium Limited"
P4: library part "Header 6", "Header, 6-Pin", LatestRevisionDate=17-Jul-2002, LatestRevisionNote="Re-released for DXP Platform.", Publisher="Altium Limited"
P5: library part "Header 10X2A", "Header, 10-Pin, Dual row", LatestRevisionDate=17-Jul-2002, LatestRevisionNote="Re-released for DXP Platform.", Publisher="Altium Limited"
P6: library part "Header 8", "Header, 8-Pin", LatestRevisionDate=17-Jul-2002, LatestRevisionNote="Re-released for DXP Platform.", Publisher="Altium Limited"
R1 R2 R3 R4 R5: library part CMP-009-00017-5, "Chip Resistor, 10 KOhm, +/- 1%, 01 W, -55 to 155 degC, 0603 (1608 Metric)", Case/Package=0603, Max Operating Temperature=155°C, Min Operating Temperature=-55°C, Power=100mW, Tolerance=1%, Voltage Rating=50V, Mounting Technology=SM, Pins=2, RoHS Compliant=True
R6: library part CMP-2000-03085-2, "RES Thick Film, 220Ω, 1%, 0.1W, 100ppm/°C, 0603", Case Code (Imperial)=0603, Case Code (Metric)=1608, Max Operating Temperature=155°C, Max Power Dissipation=100mW, Min Operating Temperature=-55°C, Package Quantity=10, Resistance=220R, Temperature Coefficient=100ppm/°C, Tolerance=1%, Voltage Rating=75V, Case/Package=0603, Composition="Thick Film", Contact Plating=Tin, Depth=0.85mm, Features="Automotive AEC-Q200", Height=0.45mm, Lead Free="Lead Free", Length=1.55mm, Military Standard=Not, Number of Terminations=2, Packaging="Tape and Reel", Power Rating=100mW, Radiation Hardening=No, Termination=SMD/SMT, Voltage Rating (DC)=75V, Weight=7.1E-05oz, Width=0.033inch
R7 R11 R13 R14 R16 R17 R19 R20 R21 R23 R24 R25: library part CMP-2100-03667-1, "Chip Resistor, 0 Ohm, +/- 5%, 0.1 W, -55 to 155 degC, 0603 (1608 Metric), RoHS, Tape and Reel", Case Code (Imperial)=0603, Case Code (Metric)=1608, Manufacturer=Yageo, Max Operating Temperature=155degC, Min Operating Temperature=-55degC, Package Description="2-Pin Surface Mount Device, Body 1.6 x 0.8 mm", Package Quantity=5000, Power Rating=100mW, Resistance=0mOhm, Temperature Coefficient=200ppm/degreesC, Tolerance=5%, Voltage Rating=50V, Case/Package=0603, Composition=ThickFilm, Contact Plating=Tin, Datasheet URL=http://www.yageo.com/NewPortal/yageodocoutput?fileName=/pdf/R-Chip/PYu-RC_Group_51_RoHS_L_5.pdf, Datasheet Version="Rev. 5, 10/2016", Depth=0.8mm, Height=0.45mm, Lead Free=LeadFree, Length=1.6mm, Manufacturer URL=http://www.yageo.com/, Military Standard=Not, Number of Pins=2, Package Reference=0603, Packaging=TapeandReel, Radiation Hardening=No, REACH SVHC=NoSVHC, RoHSCompliant=true, Termination=SMD/SMT, Voltage Rating (DC)=50V, Width=0.8mm
R8 R15: library part CMP-1012-00586-3, "Precision Thick Film Chip Resistor, 4.7 KOhm, +/- 1%, -55 to 155 degC, 0603 (1608 Metric), RoHS, Tape and Reel", Case Code (Imperial)=1206, Case Code (Metric)=3216, Case\Package=1205, Max Operating Temperature="125 degC", Min Operating Temperature="-55 degC", Package Quantity=1, Power Rating="250 mW", Resistance="220 Ohm", Tolerance=5%, Type (Resistor)="Thick Film", Voltage Rating="50 V", ComponentLink1Description="Manufacturer URL", ComponentLink1URL=http://www.panasonic.com/, ComponentLink2Description=Datasheet, ComponentLink2URL=http://industrial.panasonic.com/cdbs/www-data/pdf/RDA0000/AOA0000C86.pdf, DatasheetVersion=Apr-15, Elements=4, Height="0.024 inch", Length="0.126 inch", Mount="Surface Mount", PackageDescription="2-Pin Surface Mount Device, Body 1.6 x 0.85 mm", PackageReference=0603, Packaging="Tape and Reel", Pins=8, Radiation Hardening=No, REACH SVHC="No SVHC", RoHSCompliant=true, Width="0.063 inch"
R9 R18: library part CMP-02407-013067-1, "RES SMD 50K OHM 0.02% 1/10W 0603", Case Code (Imperial)=0603, Case Code (Metric)=1608, Max Operating Temperature=125°C, Max Power Dissipation=100mW, Min Operating Temperature=-55°C, Resistance=50kR, Resistor Type="Thin Film", Temperature Coefficient=5ppm/°C, Tolerance=0.02%, Case/Package=0603, Features="Moisture Resistant", Number of Terminations=2, Packaging="Cut Tape"
R10 R12: library part CMP-1012-00623-3, "Chip Resistor, 10 KOhm, +/- 1%, 0.1 W, -55 to 155 degC, 0603 (1608 Metric), RoHS, Tape and Reel", Case Code (Imperial)=0603, Case Code (Metric)=1608, Manufacturer=Panasonic, Max Operating Temperature=155degC, Max Power Dissipation=100mW, Min Operating Temperature=-55degC, Package Description="2-Pin Surface Mount Device, Body 1.6 x 0.85 mm", Package Quantity=1, Package Reference=603, Resistance=10KOhm, Temperature Coefficient=100ppm\/degreesC, Tolerance=1%, Voltage Rating=75V, Case\/Package=0603, Composition=ThickFilm, Contact Plating=Tin, Datasheet URL=https://industrial.panasonic.com/cdbs/www-data/pdf/RDA0000/AOA0000C304.pdf, Datasheet Version=02/2017, Depth=0.8mm, Height=0.45mm, Lead Free=LeadFree, Length=1.6mm, Manufacturer URL=http://www.panasonic.com/, Military Standard=Not, Mount=SurfaceMount, Mounting Technology=SurfaceMount, Number of Pins=2, Number of Terminations=2, Packaging=TapeandReel, Power Rating=100mW, Radiation Hardening=No, REACH SVHC=NoSVHC, RoHSCompliant=true, Termination=SMD/SMT, Voltage Rating (DC)=75V, Width=0.031inch
R22: library part CMP-1012-00670-3, "RES Thick Film, 27kΩ, 1%, 0.1W, 100ppm/°C, 0603", Case Code (Imperial)=0603, Case Code (Metric)=1608, Max Operating Temperature=155°C, Max Power Dissipation=100mW, Min Operating Temperature=-55°C, Package Quantity=10, Resistance=27kR, Temperature Coefficient=100ppm/°C, Tolerance=1%, Voltage Rating=75V, Case/Package=0603, Composition="Thick Film", Contact Plating=Tin, Depth=0.85mm, Features="Automotive AEC-Q200", Height=0.45mm, Lead Free="Lead Free", Length=1.55mm, Military Standard=Not, Mount="Surface Mount", Number of Pins=2, Number of Terminations=2, Packaging="Tape and Reel", Power Rating=100mW, Radiation Hardening=No, Termination=SMD/SMT, Voltage Rating (DC)=75V, Weight=7.1E-05oz, Width=0.85mm
SW1 SW2 SW3 SW4 SW5: library part CMP-011-00008-2, "Tactile Switch, SPST-NO, 50 mA, 12 V, 4-Pin SMD, RoHS, Tape and Reel", Current Rating=50mA, Manufacturer=E-Switch, Max Voltage Rating (DC)=12V, Operating Force=1.6N, Package Description="4-Pin Surface Mount Device, Body 5 x 5 mm, Pitch 6.3 mm", Package Quantity=3000, Case/Package=TL3342F160QG, Contact Material=Silver, Contact Plating=Silver, Datasheet URL=http://spec_sheets.e-switch.com/specs/P010632.pdf, Datasheet Version="Rev. I, 12/2010", Manufacturer URL=http://www.e-switch.ch/en/, Mounting Technology=SM, Package Reference=TL3342F160QG, Packaging=TapeandReel, RoHS Compliant=True, Throw Configuration=SPST, Voltage Rating (DC)=12V
TP1 TP2 TP3 TP4 TP5 TP6 TP7 TP8 TP9 TP10 TP11 TP12 TP13 TP14 TP15 TP16 TP17 TP18 TP19 TP20: library part CMP-002-00037-2, "Test Point, Orange, Height 4.6 mm, Tail Length 3 mm, 1-Pin THD, RoHS", Colour=Orange, Manufacturer=Keystone, Package Description="1-Pin Through Hole Device, Dia 2.54 mm", Package Quantity=10, Case/Package=5003, Connector Type=TestPoint, Contact Material=Bronze, Contact Plating=Tin, Datasheet URL=http://keyelco.com/userAssets/file/M65p56.pdf, Datasheet Version=Jun-15, Diameter=2.54mm, Manufacturer URL=http://www.keyelco.com/, Mounting Technology=TH, Package Reference=5003, Packaging=Bulk, Pins=1, RoHS Compliant=True
Y1: "Crystal or Oscillator", Manufacturer_Name=ECS, Mouser Part Number=520-160-12-33AGN-TR3, Arrow Part Number=ECS-160-12-33-AGN-TR3, Arrow Price/Stock=https://www.arrow.com/en/products/ecs-160-12-33-agn-tr3/ecs-international?region=nac, Datasheet Link=https://ecsxtal.com/store/pdf/ecx-32.pdf, Height=0.8mm, Manufacturer_Part_Number=ECS-160-12-33-AGN-TR3, Mouser Price/Stock=https://www.mouser.co.uk/ProductDetail/ECS/ECS-160-12-33-AGN-TR3?qs=e8oIoAS2J1R5dXUdgVaN0g%3D%3D

## Via types
v1: diameter 30, hole 15, Top Layer to Bottom Layer, 55 vias
v2: diameter 25, hole 10, Top Layer to Bottom Layer, 23 vias
v3: diameter 50, hole 28, Top Layer to Bottom Layer, 13 vias
v4: diameter 30, hole 16, Top Layer to Bottom Layer, 3 vias

## Nets (pads, with @x,y where several pads share a name; then routed paths per layer and width w, separated by ;. In a path a pad name is that pad's centre, name@x,y a point inside that pad or via, vN(x,y) a via of type N, cw(c..) or ccw(c..) an arc to the next point about the centre after c; other vN are vias at no path point)
3V3: C2.1 C3.2 C6.2 C7.2 C9.2 C12.2 C14.1 C17.2 C18.2 C19.2 C20.2 C21.2 C22.2 IC1.1 IC1.9 IC1.24 IC1.36 IC1.48 IC2.3 IC2.7 LED1.2 P1.5 P3.2 P5.1 R1.2 R2.2 R3.2 R4.2 R5.2 R7.1 R8.2 R9.2 R10.2 R12.2 R15.1 R17.2 R18.1 R21.1 R22.2 R25.1 TP11.1 | length 3614.5
  Top Layer w7: 1419.06,2905.94 1430,2895
  Top Layer w10: TP11.1@1165,1510 TP11.1@1171.33,1503.67 ; P3.2 P3.2@1188.99,2415 ; R1.2 R1.2@1303.94,2329.06 ; v1(1890,2885) 1910.83,2864.17 1937.24,2864.17 IC1.1 1961.28,2863.27 1996.73,2898.72 IC1.48 ; C14.1 1919.92,2458.06 1919.92,2485.33 1929.22,2494.63 1929.22,2522.76 v1(1929.52,2523.05) ; IC1.9 2010.38,2705.79 2019.59,2715 v1(2025,2715)
  Top Layer w15: v1(1994.42,2445.58) 1997.29,2442.71 2023.8,2442.71 2025.12,2444.03 2025.12,2447.13 C12.2@2033.04,2439.21
  Top Layer w19.68: 1430,2895 v4(1480,2895)
  Top Layer w20: TP11.1@1165,1510 LED1.2 ; R1.2@1303.94,2329.06 1306.09,2331.21 1306.09,2383.09 v1(1308,2385) ; IC2.3@1404.06,2980.35 1404.06,2920.94 1419.06,2905.94 C9.2 ; R25.1@1812.46,1512.3 1937.3,1512.3 v3(1940,1515) ; C14.1 C14.1@1906.96,2441.18 ; R10.2 2259.93,2510 2280.77,2530.84 v3(2285.5,2530.84) ; R21.1 2276.57,1519.53 2301.3,1494.8 2349.8,1494.8 v1(2350,1495)
  Top Layer w25: v3@1490,3098.31 v3(1490,3100) ; P5.1@1600.49,3045.49 P5.1 ; 2219.86,2586.57 2264.9,2586.57 2280.72,2570.76 2280.72,2535.62 v3(2285.5,2530.84) ; 2275.93,2869.86 v3(2275.93,2935.93)
  Top Layer w30: P1.5@2485,2677.9 P1.5
  Bottom Layer w10: R15.1@1480,2855 v4(1480,2895) ; v1(1675,1990) 1726.06,1990 R7.1@1736.06,2000 ; 1740.43,2190.47 1740.83,2190.47 ; IC2.3@1830,2448.54 1833.86,2452.4 1833.86,2477.81 1845.18,2489.13 v2(1845.18,2493.19) ; C6.2 1995.78,2768.83 2024.4,2768.83 ; C3.2 2019,2845.61 2019,2774.23 2024.4,2768.83 ; v1(2025,2715) 2024.4,2715.6 2024.4,2768.83 ; C7.2 2275.93,2865.14 v3(2275.93,2935.93) ; R18.1 2300.16,2114.53 2305,2119.37 C22.2 ; R17.2@2405.08,2230.39 R17.2 ; R12.2 R12.2@2480,2385 ; v3(2480,2510) v3@2490.82,2510 ; R9.2@2556.49,2464.37 2561.33,2459.53 R9.2 ; v1(2825,2260) 2836.86,2248.14 2854.25,2248.14 2865,2258.89 R2.2 ; v2(2850,2130) v2@2850.47,2130.47 ; R4.2@2851.75,2078.25 R4.2@2865.94,2064.06
  Bottom Layer w20: P3.2 1259.61,2415 C21.2 ; v1(1270,2625) 1385.94,2625 R8.2 ; v1(1455,2605) 1456.91,2606.91 1456.91,2622.7 C20.2 ; v2(1630,2170) C18.2 1698.04,2225.79 1712.74,2211.09 1720.21,2211.09 1740.83,2190.47 ; 1740.43,2190.47 1780,2150.9 IC2.7 ; C22.2 R17.2@2405.08,2230.39 ; R17.2 2405.47,2435.47 v3(2480,2510) ; R12.2@2480,2385 v3(2480,2510) ; R9.2@2556.49,2464.37 2556.49,2478.51 2540,2495 2495,2495 v3(2480,2510) ; v2@2850.47,2130.47 R3.2 ; R4.2@2851.75,2078.25 v2@2851.75,2130 ; R5.2@2865.94,1995 R4.2@2865.94,2064.06
  Bottom Layer w25: v3(1490,3100) 1535,3055 P5.1 1623.49,3041.51 1623.49,2987.97 1646.46,2965 R22.2 ; C3.2 2014.61,2912.58 2022.03,2920 C2.1
6V: C1.1 C10.2 IC2.2@1345,2975.83 IC2.4@1345,3065 P2.1 | length 616.9
  Top Layer w25: P2.1@1202.03,3037.03 1213.7,3037.03 1216.67,3040 IC2.4@1349.45,3040 ; IC2.2@1343.06,2973.89 IC2.2@1345,2975.83 ; IC2.2@1345,2966.67 IC2.4@1345,3099.45 ; IC2.4@1345,3065 1345,3086.59 1375,3116.59 C10.2
  Bottom Layer w20: C1.1 1150.47,2889.53 1137.19,2902.81 1137.19,2972.19 P2.1
BT_EN: IC1.3 P4.6 | length 2421.8
  Top Layer w10: v2(1481.57,2530.02) 1482.33,2530.02 1666.32,2714 v2(1666.32,2756.5) ; v1(1876.32,2831.5) 1881.73,2831.5 1889.33,2823.9 IC1.3
  Plane (PWR) w10: v2(1765,2850) 1810.73,2850 1829.23,2831.5 v1(1876.32,2831.5)
  Bottom Layer w10: v2(1481.57,2530.02) 1481.57,2500.95 1485,2497.52 1485,2455 1454.74,2424.74 1454.74,2248.82 1394.47,2188.56 1394.47,1598.21 1518.69,1474 1928.31,1474 2047.31,1355 P4.6@2120,1355 ; v2(1666.32,2756.5) 1668.91,2756.5 1762.41,2850 v2(1765,2850)
GND: C1.2 C2.2 C3.1 C4.2 C5.1 C6.1 C7.1 C8.1 C9.1 C10.1 C11.2 C12.1 C13.2 C14.2 C15.2 C16.2 C17.1 C18.1 C19.1 C20.1 C21.1 C22.1 IC1.8 IC1.23 IC1.35 IC1.47 IC2.1@1285.94,2980.35 IC2.4@1880,2448.54 IC2.9 J1.6 P1.4 P2.2 P3.1 P4.4 P5.10 P6.5 P6.7 P6.8 R6.1 SW1.3 SW1.4 SW2.3 SW2.4 SW3.3 SW3.4 SW4.3 SW4.4 SW5.3 SW5.4 TP1.1 Y1.2 Y1.4 | length 3967.3
  Top Layer w7: v1(2963.42,1968.42) 3001.73,1968.42 J1.6
  Top Layer w10: R6.1@1129.47,1763.53 R6.1 ; v3@1150,1839.18 v3(1150,1850) ; SW1.3@1150,1930.79 SW1.3 ; P2.2 1198.27,2920 P2.2@1210.93,2932.66 ; 1360,2813.38 1365.86,2807.53 ; C4.2 C4.2@1719.72,2903.78 ; Y1.4@1719.29,2800 Y1.4 ; C5.1@1785,2622.01 C5.1 C5.1@1808.58,2645.59 ; C17.1@1868.48,1461.52 1870.79,1461.52 1885.61,1446.69 1885.61,1359.39 P6.7 ; C14.2 1913,2372 v1(1913,2325) ; IC1.8 1996.21,2725.47 2011.74,2741 2054,2741 v1(2055,2740) ; v1(1970,2975) 1973.83,2971.17 1997.91,2971.17 2015.51,2953.57 2015.51,2922.76 IC1.47 ; v1(2190,2665) 2192.68,2662.32 2192.68,2589.06 IC1.23 ; IC1.35 2272.76,2844.49 2329.49,2844.49 2340,2855 2340,2865 2355,2880 v3(2355,2930) ; C19.1 2300,1388.27 2320,1368.27 P4.4@2320,1355
  Top Layer w20: R6.1 1130.94,1820.12 v3@1150,1839.18 ; SW1.3@1150,1930.79 v3(1150,1850) C8.1 ; SW1.4 1155.2,2285.2 P3.1 ; P2.2@1210.93,2932.66 1252.66,2932.66 1276.3,2956.3 1284.53,2956.3 1285.94,2957.72 IC2.1@1285.94,2980.35 ; v3(1255,3195) 1260.57,3195 1280.57,3175 C10.1 ; 1360,2813.38 C9.1 ; 1365.86,2807.53 1384.82,2807.53 1387.29,2810 v1(1390,2810) ; Y1.4@1719.29,2800 1720,2800.71 1719.86,2800.85 1719.86,2844.86 v1(1720,2845) ; v1@1719.72,2845 C4.2@1719.72,2903.78 ; v1(1769.5,2560.1) 1769.5,2564.92 1785,2580.41 C5.1@1785,2622.01 ; C5.1@1780,2650 1810.28,2680.28 Y1.2 ; C12.1 2040,2385 2085,2385 v3(2090,2380)
  Bottom Layer w10: P2.2 1185,2906.73 1209.53,2882.2 C1.2 ; v1(1390,2810) 1390,2805 C20.1 ; C18.1@1616.3,2261.3 C18.1 ; IC2.9@1785,2275 IC2.9 1817.09,2295 1880,2357.91 IC2.4@1880,2448.54 ; C3.1 1965.39,2914.61 C2.2 1960,2959.59 1970,2969.59 v1(1970,2975) ; C6.1 1998.7,2716.69 1998.7,2704.53 2014.23,2689 2035.77,2689 2051.77,2705 2051.77,2736.77 v1(2055,2740) ; C7.1 2315,2890 v3(2355,2930) ; v2(2630,2975) 2632.87,2972.13 2644.88,2972.13 2672.2,2944.8 SW3.4 SW3.4@2680,2938.82 ; v2(2640.07,3200.88) 2655.95,3185 SW2.4 SW2.4@2685.31,3199.69 ; SW4.4@2665,2710.12 2673.7,2718.82 2675,2718.82 SW4.4 ; SW5.4@2680.79,2510 SW5.4 ; v2(2880,2530) 2884.06,2530 2889.57,2524.49 2914.33,2524.49 SW5.3 2942.8,2509.8 SW5.3@2957.48,2495.12 ; v2(2890,3215) 2892.87,3212.13 2907.12,3212.13 2934.25,3185 SW2.3 ; v2(2930,2680) 2929.02,2680.98 SW4.3 SW4.3@2942.8,2724.8 ; SW3.3@2947.8,2944.8 2957.48,2935.12 SW3.3@2962.48,2930.12 ; SW2.3@2957.8,3179.8 2972.48,3165.12 2972.48,3157.13 C11.2
  Bottom Layer w20: C21.1 1292.7,2497.3 1342.3,2497.3 v3(1345,2500) ; v1(1565,2225) 1601.3,2261.3 C18.1@1616.3,2261.3 ; C18.1 IC2.9@1785,2275 ; C22.1 2330.39,2305 v3(2355,2305) ; v1(2620,2510) SW5.4@2680.79,2510 ; v1(2665,2660) SW4.4@2665,2710.12 ; v2(2935,2905) 2935,2943.82 SW3.3 SW3.3@2947.8,2944.8 ; SW4.3@2942.8,2724.8 2998.89,2668.71 2998.89,2641.11 C15.2 ; SW5.3@2957.48,2495.12 2957.48,2471.73 C16.2 ; SW3.3@2957.48,2935.12 2957.48,2932.52 2996.3,2893.7 2996.3,2878.31 C13.2
I2C_SCL: IC1.30 P3.3 R8.1 TP18.1 | length 1904
  Top Layer w10: v1(1824.73,2540.6) 1827.83,2540.6 1834.83,2547.6 1834.83,2569.83 1894.83,2629.83 1971.74,2629.83 2030.92,2689 2035.77,2689 2060.77,2714 2114.15,2714 2145.31,2745.16 IC1.30
  Plane (PWR) w10: v1(1760,2495) 1763.72,2498.72 1783.72,2498.72 1824.73,2539.73 v1(1824.73,2540.6)
  Bottom Layer w10: P3.3 1239.53,2515 1294.53,2570 R8.1 1403.7,2556.3 1527.67,2556.3 1594,2489.97 1594,2466.1 1599.86,2460.24 1643.77,2460.24 1678.53,2495 v1(1760,2495) ; v1(1824.73,2540.6) 1830.14,2540.6 1844.54,2555 1845,2555 1856,2566 1890.77,2566 1894.77,2562 2141.38,2562 2208.54,2494.84 2316.38,2494.84 2316.54,2495 TP18.1@2388.02,2495
I2C_SDA: IC1.31 P3.4 R15.2 TP17.1 | length 1933.4
  Top Layer w10: v1(1275,2675) 1330,2675 TP17.1 ; IC1.31 2271.93,2764.92 2344.82,2764.92 2349.57,2760.18 v1(2379.82,2760.18)
  Plane (PWR) w10: TP17.1 1459,2804 1890.77,2804 1977.5,2890.73 1977.5,2914.27 2064.23,3001 2085.77,3001 2131.61,2955.16 2131.61,2826.23 2154.52,2803.32 2154.52,2754.58 2163.44,2745.66 2189.33,2745.66 2197.67,2754 2343.47,2754 2349.65,2760.18 v1(2379.82,2760.18)
  Bottom Layer w10: P3.4 1245,2675 v1(1275,2675) ; TP17.1 1395,2740.97 1364,2771.97 1364,2820.77 1379.23,2836 1424,2836 R15.2
NetIC2_2: IC2.2@1780,2448.54 R13.1 | length 155.2
  Bottom Layer w10: R13.1 1709.06,2541.06 1729.12,2521 1770.77,2521 1786,2505.77 1786,2468.1 1783.86,2465.96 1783.86,2452.4 IC2.2@1780,2448.54
NetIC2_5: IC2.5 R11.2 | length 142.4
  Bottom Layer w7: IC2.5 1883.54,2145 R11.2
NetIC2_8: IC2.8 R7.2 | length 86.5
  Bottom Layer w10: IC2.8 1730,2131.62 1740,2121.62 R7.2
NetJ1_1: J1.1 R9.1 | length 562
  Top Layer w10: v1(2735,2205) 2740.41,2205 2757.26,2188.15 J1.1
  Bottom Layer w10: R9.1 2597.72,2400.47 2620.34,2377.85 2620.34,2352.14 2735,2237.48 v1(2735,2205)
NetJ1_3: J1.3 R16.1 | length 563.3
  Top Layer w10: v1(2605,2080) 2607.43,2080 2627.43,2100 3003.39,2100 J1.3
  Bottom Layer w10: R16.1 2570,2115 v1(2605,2080)
NetJ1_4: J1.4 R17.1 | length 629.3
  Top Layer w10: v1(2635,2060) 3003.15,2060 J1.4
  Bottom Layer w10: R17.1 2495.28,2230 2635,2090.28 v1(2635,2060)
NetJ1_7: J1.7 R14.1 | length 589.4
  Top Layer w10: v1(2885,1915) 2886.58,1916.58 2993.19,1916.58 J1.7
  Bottom Layer w10: R14.1 2624.93,2020 2729.93,1915 v1(2885,1915)
NetJ1_8: J1.8 R18.2 | length 800.1
  Top Layer w7: v1(2352.5,1972.5) 2355,1970 2650.41,1970 2736.99,1883.41 3001.36,1883.41 J1.8
  Bottom Layer w7: R18.2 2307.87,2055.47 2314.22,2049.13 2314.22,2010.78 v1(2352.5,1972.5)
NetLED1_1: LED1.1 R6.2 | length 110.4
  Top Layer w15: LED1.1 1165,1735.08 1190,1760.08 R6.2
NetP4_1: P4.1 R19.2 | length 100
  Top Layer w10: P4.1@2620,1355 R19.2
NetP4_3: P4.3 R20.2 | length 93
  Top Layer w10: R20.2 2420,1440.94 P4.3@2420,1355
NetP4_5: P4.5 R21.2 | length 113.5
  Top Layer w10: P4.5@2220,1355 2220.31,1355.31 2220.31,1449.25 2231.06,1460 R21.2@2235,1460
NetP6_2: P6.2 R23.2 | length 110
  Top Layer w10: P6.2@1395,1355 R23.2@1395,1465
NetP6_3: P6.3 R24.1 | length 118.8
  Top Layer w10: P6.3@1495,1355 1495,1368.27 1515,1388.27 R24.1
NetP6_6: P6.6 R25.2 | length 113.3
  Top Layer w10: P6.6 1795,1360.39 1815,1380.39 R25.2@1815,1455
NRST: C8.2 IC1.7 P1.3 R1.1 SW1.1 SW1.2 | length 1929.7
  Top Layer w7: C8.2 1290,1921.18 SW1.1 1310,1941.18 1310,2178.82 SW1.2 R1.1@1304.8,2270 ; R1.1 R1.1@1304.8,2270 ; v1(1620,2486.24) 1620,2485 1618.76,2486.24 1571.05,2486.24 1354.81,2270 R1.1@1304.8,2270 ; v1(1860,2730) 1865.75,2730 1880.9,2745.16 1981.21,2745.16 2000.56,2764.5 2075.85,2764.5 2099.85,2740.5 2120.15,2740.5 2153.19,2773.54 v4(2180.52,2773.54)
  Bottom Layer w7: v1(1620,2486.24) 1621.24,2486.24 1640.39,2505.39 1659.26,2505.39 1675.25,2521.38 1675.25,2560.06 1725.14,2609.96 1814.6,2609.96 1865,2660.35 1865,2689.56 1860,2694.56 v1(1860,2730) ; v4(2180.52,2773.54) 2180.52,2777.97 2202.25,2799.7 2328.92,2799.7 2329.22,2800 P1.3@2485,2800
OSC_IN: C4.1 IC1.5 Y1.3 | length 254.4
  Top Layer w7: IC1.5@1935.74,2786.93 IC1.5
  Top Layer w10: C4.1@1781.5,2902.05 C4.1
  Top Layer w12: C4.1@1781.5,2902.05 1810.28,2873.27 Y1.3 1864.99,2800.43 1880.9,2784.53 IC1.5
OSC_OUT: C5.2 IC1.6 Y1.1 | length 333.1
  Top Layer w12: Y1.1 1725,2729.57 1725,2730.91 1739.31,2745.22 1750.22,2745.22 1768.22,2763.22 1798.22,2763.22 1799.84,2764.84 IC1.6 ; C5.2 Y1.1@1725,2724.29
PR_XBEE: P5.2 P5.3 P5.5 P5.6 P5.7 P5.8 P5.9 P5.12 P5.13 P5.14 P5.15 P5.16 P5.20 R22.1 | length 1378.4
  Top Layer w7: P5.3 P5.2 P5.12 P5.13 P5.14 ; P5.16 P5.15 P5.14 ; P5.7 P5.6 P5.5 P5.14 ; P5.8@2305.35,3055 P5.8 P5.9 P5.20
  Bottom Layer w7: P5.2 1710,2967.1 R22.1 ; P5.7 P5.8
SEL1: C11.1 IC1.46 R2.1 SW2.1 SW2.2 | length 2300.9
  Top Layer w7: IC1.46 2036.1,2800.12 2044.87,2791.35 2067.65,2791.35 v1(2070,2789) ; v2(2347,2600) 2417.72,2529.28 2417.72,2522.28 2485,2455 v2(2810,2455) ; v2@2810,2457.53 2795,2472.53 2795,2915 v2(2880,3000)
  Plane (PWR) w7: v2(2810,2455) v2@2810,2457.53
  Bottom Layer w7: v1(2070,2789) 2072.05,2789 2093.47,2810.42 2122.05,2810.42 2137.02,2795.46 2137.02,2764 2164.99,2736.04 2210.96,2736.04 v2(2347,2600) ; SW2.2@2695.98,3030.2 SW2.1@2930.24,3030.2 ; v2(2810,2455) 2810,2412.63 2920,2302.63 2920,2264.06 R2.1 ; v2(2880,3000) 2882.96,3002.96 2903,3002.96 SW2.1@2930.24,3030.2 ; C11.1 2985.77,3046.16 2959.98,3046.16 2944.02,3030.2 SW2.1@2930.24,3030.2
SEL2: C13.1 IC1.45 R3.1 SW3.1 SW3.2 | length 1943.2
  Top Layer w7: IC1.45 2055.39,2921.46 2055.39,2866.17 2061.24,2860.32 2061.24,2839.64 v1(2061.93,2838.95)
  Bottom Layer w7: v1(2061.93,2838.95) 2111.91,2838.95 2150.02,2800.84 2150.02,2769.39 2170.37,2749.04 2279.43,2749.04 2315.39,2785 2390.79,2785 2430.79,2745 2622.01,2745 2624.03,2747.02 ; R3.1 2909.53,2173.94 2895,2188.47 2895,2278.87 2756.93,2416.94 2673.06,2416.94 2582.45,2507.55 2582.45,2543.76 2570.5,2555.71 2570.5,2610.5 2624.03,2664.03 2624.03,2747.02 ; C13.1@3010,2825.79 2978.39,2825.79 2947.8,2795.2 SW3.1 SW3.2 2672.2,2795.2 2624.03,2747.02
SEL3: C15.1 IC1.44 R4.1 SW4.1 SW4.2 | length 1875.1
  Top Layer w10: v1(2075,2975) 2075.24,2974.76 2075.24,2922.09 IC1.44
  Plane (PWR) w10: v1(2075,2975) 2075,2885.27 2112.53,2847.75 2112.53,2822.68 2138.52,2796.69 2138.52,2747.95 2156.81,2729.66 2253.03,2729.66 2412.69,2570 v3(2605,2570) 2676.7,2570 2747.32,2499.38 2747.32,2422.13 2744.26,2419.07 v2(2744.26,2389.63)
  Bottom Layer w10: v3(2605,2570) 2675.79,2570 SW4.2 SW4.1 2939.61,2585.79 C15.1 ; v2(2744.26,2389.63) 2798.07,2335.82 R4.1
SEL4: C16.1 IC1.43 R5.1 SW5.1 SW5.2 | length 2010.3
  Top Layer w10: IC1.43 2095.16,2831.24 2110,2816.4 v1(2110,2765)
  Bottom Layer w10: v1(2110,2765) 2112.52,2762.48 2112.52,2747.48 2150,2710 2185,2710 2318.5,2576.5 2492.99,2576.5 2593.72,2475.78 2593.72,2466.28 2670.97,2389.03 2670.97,2370.21 SW5.2 2680.98,2329.02 2761,2249 2761,2053.41 2805.47,2008.94 R5.1 2805.47,1940.86 2811.33,1935 2850.37,1935 2950.8,2035.43 2950.8,2345.51 2936.12,2360.2 SW5.1 2938.82,2370 C16.1
SPI1_CLK: IC1.15 P6.4 TP3.1 | length 1560.5
  Top Layer w10: P6.4 1595,1575 TP3.1@1785.86,1765.86 ; v1@2036.1,2519.31 IC1.15
  Bottom Layer w10: P6.4 P6.4@1595,1362.97 ; TP3.1@1790,1770 1680,1880 1680,1898.23 1730.62,1948.85 1739.84,1948.85 1770.69,1979.7 1770.69,1980.69 1790.46,2000.46 1790.46,2108.8 1801,2119.34 1801,2168.79 1848.3,2216.09 1895.19,2216.09 1949,2269.9 1949,2314.23 1939,2324.23 1939,2353.4 2035,2449.4 v1(2035,2520)
SPI1_CS: IC1.14 P6.1 TP2.1 | length 1819.9
  Top Layer w10: P6.1 1305,1360 1305,1645 TP2.1@1454.37,1794.37 ; IC1.14 2016.42,2641.42 2023.49,2648.49 2024.59,2648.49 2041.72,2665.61 v1(2047.13,2665.61)
  Plane (PWR) w10: v1(1716.53,2388.47) 1810.95,2482.88 1810.95,2492.19 1833.36,2514.6 1835.5,2514.6 1854,2533.1 1854,2550.77 1973.23,2670 2012.13,2670 2016.52,2665.61 v1(2047.13,2665.61)
  Bottom Layer w10: TP2.1@1431.18,1771.18 1480,1820 1480,2177.96 1606.74,2304.7 1632.77,2304.7 v1(1716.53,2388.47)
SPI1_MISO: IC1.16 R24.2 TP4.1 | length 1567.1
  Top Layer w7: R24.2 1515,1557.54 1556.12,1598.66 v3(1567.75,1598.66) ; TP4.1 1569.96,2164.96 1680.76,2275.76 1680.76,2290.76 v2(1795,2405) ; v1(1895.11,2533.66) 1901.34,2533.66 1915.23,2547.55 1939.66,2547.55 1954.02,2533.2 1954.02,2510.79 1945.5,2502.27 1945.5,2479.85 1959.85,2465.5 1980.15,2465.5 1987,2472.35 2048,2472.35 2070.5,2494.85 2070.5,2515.25 2062.24,2523.51 2062.24,2527.41 2055.79,2533.86 IC1.16
  Bottom Layer w7: v3(1567.75,1598.66) 1568.86,1599.76 1568.86,2098.94 TP4.1 ; v2(1795,2405) 1811.64,2421.64 1811.64,2490.77 1854.53,2533.66 v1(1895.11,2533.66)
SPI1_MOSI: IC1.17 R23.1 TP5.1 | length 1436.7
  Top Layer w7: R23.1@1396.06,1519.06 R23.1 1403.94,1519.06 1515.97,1631.09 1515.97,1631.17 1899.81,2015 TP5.1@1960,2015 ; IC1.17 2075.24,2587.91 2075.24,2528.89 2083.5,2520.63 2083.5,2487.38 2080,2483.88 v1(2080,2451)
  Bottom Layer w7: TP5.1@1960,2015 2046.19,2101.19 2046.19,2209.93 1998.5,2257.62 1998.5,2368.5 2080,2450 v1(2080,2451)
SPI2_CLK: IC1.21 IC2.6 J1.5 TP14.1 | length 1813.4
  Top Layer w10: v1(1965,2335) 1968.58,2338.58 2009.03,2338.58 2016.64,2330.97 v1(2044.03,2330.97) 2047.86,2327.14 2047.86,2317.25 2050,2315.11 2050,2270 TP14.1 ; v1(2143.05,2453.83) 2143.05,2531.29 2154.21,2542.45 IC1.21 ; TP14.1@2195,2120 2528.23,2120 2621.58,2026.65 2993.19,2026.65 J1.5
  Bottom Layer w10: IC2.6 1830,2175.16 1854.93,2200.09 1901.81,2200.09 1965,2263.27 v1(1965,2335) ; v1(2044.03,2330.97) 2091.88,2330.97 2143.05,2382.14 v1(2143.05,2453.83)
SPI2_MISO: IC1.27 R13.2 R14.2 TP15.1 | length 1506.9
  Top Layer w10: v1(2130,2680) 2133.83,2683.83 2156.9,2683.83 2165,2691.93 2205.24,2691.93 2211.06,2686.1 IC1.27
  Plane (PWR) w10: v1(1840,2670) 1937.59,2670 1956.59,2689 2035.77,2689 2038.38,2691.61 2060.16,2691.61 2075.18,2676.59 2126.59,2676.59 v1(2130,2680) 2231,2579 2231,2437.52 2223.01,2429.53 2223.01,2393.01 TP15.1@2215,2385 ; TP15.1 2405,2175 v1(2405,2065)
  Bottom Layer w7: v1(2405,2065) 2405,2020.47 R14.2
  Bottom Layer w10: R13.2 1650,2575 1745,2670 v1(1840,2670) ; TP15.1@2189.39,2370 2189.39,2353.52 TP15.1@2190,2352.9
SPI2_MOSI: IC1.28 R11.1 R16.2 TP16.1 | length 1226.1
  Top Layer w7: IC1.28 2274.26,2703.38 2302.95,2703.38 2324.78,2681.54 v1(2324.78,2454.78)
  Bottom Layer w7: TP16.1@2080,1987.7 R11.1@2080,2141.06 ; R11.1 R11.1@2081.97,2145 ; v1(2324.78,2454.78) 2323.75,2453.75 2323.75,2428.95 2323.58,2428.19 cw(c2316.75,2429.73) 2320.33,2423.71 ccw(c2340,2390) 2300.98,2390.98 2090,2180 2086.07,2180 2084.02,2177.95 2081.97,2175.9 R11.1@2081.97,2145 ; R16.2 2345.93,2115 2326.11,2095.19 2278.35,2095.19 2244.76,2128.78 2244.76,2130.44 2211.17,2164.03 2161.22,2164.03 2142.19,2145 R11.1@2081.97,2145
SPI3_ATTN: IC1.42 P5.19 TP10.1 | length 1482.9
  Top Layer w7: IC1.42 2114.84,2845.16 2124.44,2835.56 2156.17,2835.56 v4(2157.61,2837)
  Plane (PWR) w7: v4(2157.61,2837) 2157.61,2830.77 2171.91,2816.47 2171.91,2806.43 2178.84,2799.5 2204.85,2799.5 2209.85,2804.5 2360.5,2804.5 2377.5,2787.5 2386.96,2787.5 2387.37,2787.91 2387.56,2787.91 2404.5,2804.85 2404.5,2931.9 2370.97,2965.43 2370.97,3115.97 P5.19 ; TP10.1@2352.5,2652.5 TP10.1@2355,2650 ; TP10.1@2365,2695 2404.32,2734.32 2404.32,2770.55 2388.96,2785.91
  Bottom Layer w7: v4(2157.61,2837) 2157.61,2830.83 2176.06,2812.39 2196.55,2812.39 2196.87,2812.7 2218.05,2812.7 2232.15,2826.8 2337.64,2826.8 2343.2,2832.36 2343.2,2832.85 2389.5,2879.15 2389.5,2999.53 2370.97,3018.06 2370.97,3115.97 P5.19
SPI3_CLK: IC1.39 P5.18 TP7.1 | length 1374.3
  Top Layer w7: IC1.39@2174.45,2944.92 2173.9,2944.37 2173.9,2856.69 v1(2193.61,2836.98) ; P5.18 2310,3140.91 2323.8,3127.11 2323.8,3126.2 v1(2340,3110)
  Bottom Layer w7: TP7.1 1609.96,2714.96 1609.96,2774.96 1840,3005 2010.35,3005 2100.6,2914.75 2114.51,2914.75 v1@2190,2839.26 ; v1@2193.61,2835 v1@2205,2835 ; v1(2193.61,2836.98) 2191.98,2836.98 2190,2835 v1@2190,2839.26 ; v1(2340,3110) 2340,3103.78 2349.03,3094.75 2349.03,3038.83 2286.72,2976.53 2249.03,2976.53 2190,2917.5 v1@2190,2839.26
SPI3_CS: IC1.38 P5.17 TP6.1 | length 1548.9
  Top Layer w7: IC1.38@2194.05,2945 2196.46,2947.41 2196.46,2976.46 2253,3033 2253,3082 2219.96,3115.04 2219.96,3145.04 P5.17
  Bottom Layer w7: TP6.1 1380.25,2865.25 1380.25,3039.04 1475.71,3134.5 1525.71,3134.5 1566.18,3094.03 1604.22,3094.03 1649.03,3138.83 1649.03,3149.22 1693.83,3194.03 1926.17,3194.03 1960,3160.19 1960,3149.81 1993.83,3115.97 2170.97,3115.97 P5.17
SPI3_MISO: IC1.40 P5.4 TP8.1 | length 668.8
  Top Layer w7: P5.4 1949.03,3015.97 2089.03,3015.97 2151.81,2953.19 2151.81,2924.26 IC1.40
  Bottom Layer w10: TP8.1 1692.31,2880 1831.81,3019.5 1859.5,3019.5 1881.01,3041.01 1882.74,3041.01 1896.73,3055 P5.4
SPI3_MOSI: IC1.41 P5.11 TP9.1 | length 904.6
  Top Layer w7: TP9.1 1515,3060 P5.11 1656.9,3108.1 1656.9,3052.91 1706.83,3002.97 2082.1,3002.97 2132.12,2952.95 2132.12,2924.26 IC1.41
SPI_F_CS: IC1.18 J1.2 R12.1 TP12.1 | length 1747
  Top Layer w10: IC1.18 2095.16,2529.48 2098,2526.64 2098,2482 2117.05,2462.95 2117.05,2443.06 2155.74,2404.38 2155.74,2374.49 2145,2363.76 2145,2215 ; 2254.46,2304.41 2254.18,2303.81 cw(c2245.15,2308.1) 2248.78,2298.78 2165,2215 2145,2215 ; 2254.46,2304.46 TP12.1 ; v1@2540.44,2220.44 2543.11,2217.76 2685.47,2217.76 2746.65,2156.58 2993.19,2156.58 J1.2 ; v1(2541.11,2221.11) 2511.11,2191.11 2168.89,2191.11 2145,2215
  Bottom Layer w10: R12.1 2479.41,2324.41 2526,2324.41 2541.11,2309.3 v1(2541.11,2221.11)
SPI_SD_CS: IC1.22 IC2.1@1730,2448.54 R10.1 TP13.1 | length 1094.1
  Top Layer w10: IC1.22 2172.99,2587.24 2172.99,2514.17 R10.1 2168.82,2508.03 2201.17,2475.68 2201.17,2453.83 v1(2205,2450)
  Bottom Layer w10: TP13.1 1557,2323 1614.3,2323 1680.3,2389 IC2.1@1730,2438.7 ; IC2.1@1730,2448.54 IC2.1@1730,2438.7 ; v1(2205,2450) 2135,2520 2071.77,2520 2045.77,2546 1989.23,2546 1921.48,2478.24 1866.59,2478.24 1855,2466.66 1855,2430.43 1843.41,2418.84 1835.9,2418.84 1818.5,2401.45 1818.5,2395.27 1804.73,2381.5 1782.21,2381.5 1781.42,2382.28 1769,2382.28 1733.86,2417.42 1733.86,2434.84 IC2.1@1730,2438.7
STATE_BT: IC1.2 R19.1 | length 2387.4
  Top Layer w7: v2(1640,2600) 1640,2500.89 1644.5,2496.39 1644.5,2263.08 1530.93,2149.51 1530.93,2064.07 v2(1705,1890) ; v2(1845,2865) 1870.53,2865 1875.03,2860.5 1881.97,2860.5 1898.88,2843.58 IC1.2 ; v2(2120,1675) 2326.2,1675 v2(2360.19,1641.01) ; v2(2606.03,1585.7) 2620,1571.73 R19.1
  Bottom Layer w7: v2(1640,2600) 1845,2805 v2(1845,2865) ; v2(1705,1890) 1745,1850 1925,1850 2096.56,1678.44 2116.56,1678.44 v2(2120,1675) ; v2(2360.19,1641.01) 2415.51,1585.7 v2(2606.03,1585.7)
SWCLK: IC1.37 P1.2 | length 449.4
  Top Layer w7: IC1.37@2213.74,2945 2213.74,2958.74 2245,2990 2495,2990 2585,2900 P1.2@2595,2890
SWDIO: IC1.34 P1.1 | length 244.7
  Top Layer w7: IC1.34 2329.4,2823.9 2405.51,2900 P1.1@2485,2900
UART_RDX: IC1.13 R20.1 TP19.1 | length 1298.3
  Top Layer w10: v1(1970,2490) 1970,2495.41 1983.56,2508.98 1983.56,2526.85 1968.47,2541.94 1968.47,2559.89 IC1.13 ; TP19.1 2190,2000 2386.74,1803.26 2386.74,1533.26 2400.31,1519.69 2400.31,1515.75 2411.06,1505 R20.1
  Plane (PWR) w10: v1(1970,2490) 1966.17,2486.17 1966.17,2460.76 1964,2458.59 1964,2439.23 2017.74,2385.49 2017.74,2224.94 2161.74,2080.94 2161.74,2038.26 TP19.1
UART_TDX: IC1.12 P4.2 TP20.1 | length 1706.2
  Top Layer w7: TP20.1@1835,2022.5 1835,2373.78 1845,2383.78 v1(1845,2390)
  Top Layer w10: v1(1845,2390) 1845.94,2390.94 1845.94,2420 1850,2424.06 1850,2447.71 1795,2502.71 1795,2555 1886.73,2646.73 IC1.12
  Bottom Layer w7: TP20.1@1827.5,2020 TP20.1 ; TP20.1@1840,2015 2163.89,1691.11 2188.54,1691.11 2431.66,1447.99 2431.66,1443.68 2520,1355.34 P4.2@2520,1355
pads on no net: IC1.4 IC1.10 IC1.11 IC1.19 IC1.20 IC1.25 IC1.26 IC1.29 IC1.32 IC1.33 J1.9 J1.10 J1.11 J1.12 J1.13 J1.14 P1.6

## Polygon pours and split planes (outlines as drawn)
3V3 on Plane (PWR) "3V3_L03_P004" (solid, pour order 4): 1060,3285 3075,3285 3090,3270 3075,3255 3075,1275 1060,1275
GND on Plane (GND) "GND_L02_P003" (solid, pour order 3): 1050,3265 1055,3270 3065,3270 3065,1275 3107.5,1232.5 3060,1185 1050,1185

## Keep-outs
Keep-Out Layer:
  lines w55: 1065,1255 3075,1255 3075,3265 1065,3265 1065,1255

## Silkscreen, mask and mechanical layers (free items; w line width, h text height)
Top Overlay:
  drawing of 7 lines, arcs and shapes, not listed
  text "6V" at 1145,3095 h40
  text "MOSI" at 1576.46,2945.61 h30
  text "SWCLK" at 2660,2870 h40
  text "SPI3" at 1466.46,2845.61 h30
  text "GND" at 1120,2790 h40
  text "MISO" at 1561.46,2780.61 h30
  text "SPI3" at 1120,2740 h30
  text "SPI3" at 2315,2730 h30
  text "CS" at 1135,2690 h30
  text "I2C" at 1346.46,2655.61 h30
  text "SPI3" at 1545,2615 h30